# Altium PCB SD171-5.0PCB2.PcbDoc (part 1 of 5)
Units mm, origin at the board's own origin, x right, y up, seen from the top; angles counter-clockwise.
Board outline 152.27 x 99.6 mm, 6 copper layers (Top Layer, InternalPlane1, Mid-Layer 1, Mid-Layer 2, InternalPlane2, Bottom Layer); 325 components, 250 nets, 1794 pads, 490 vias.
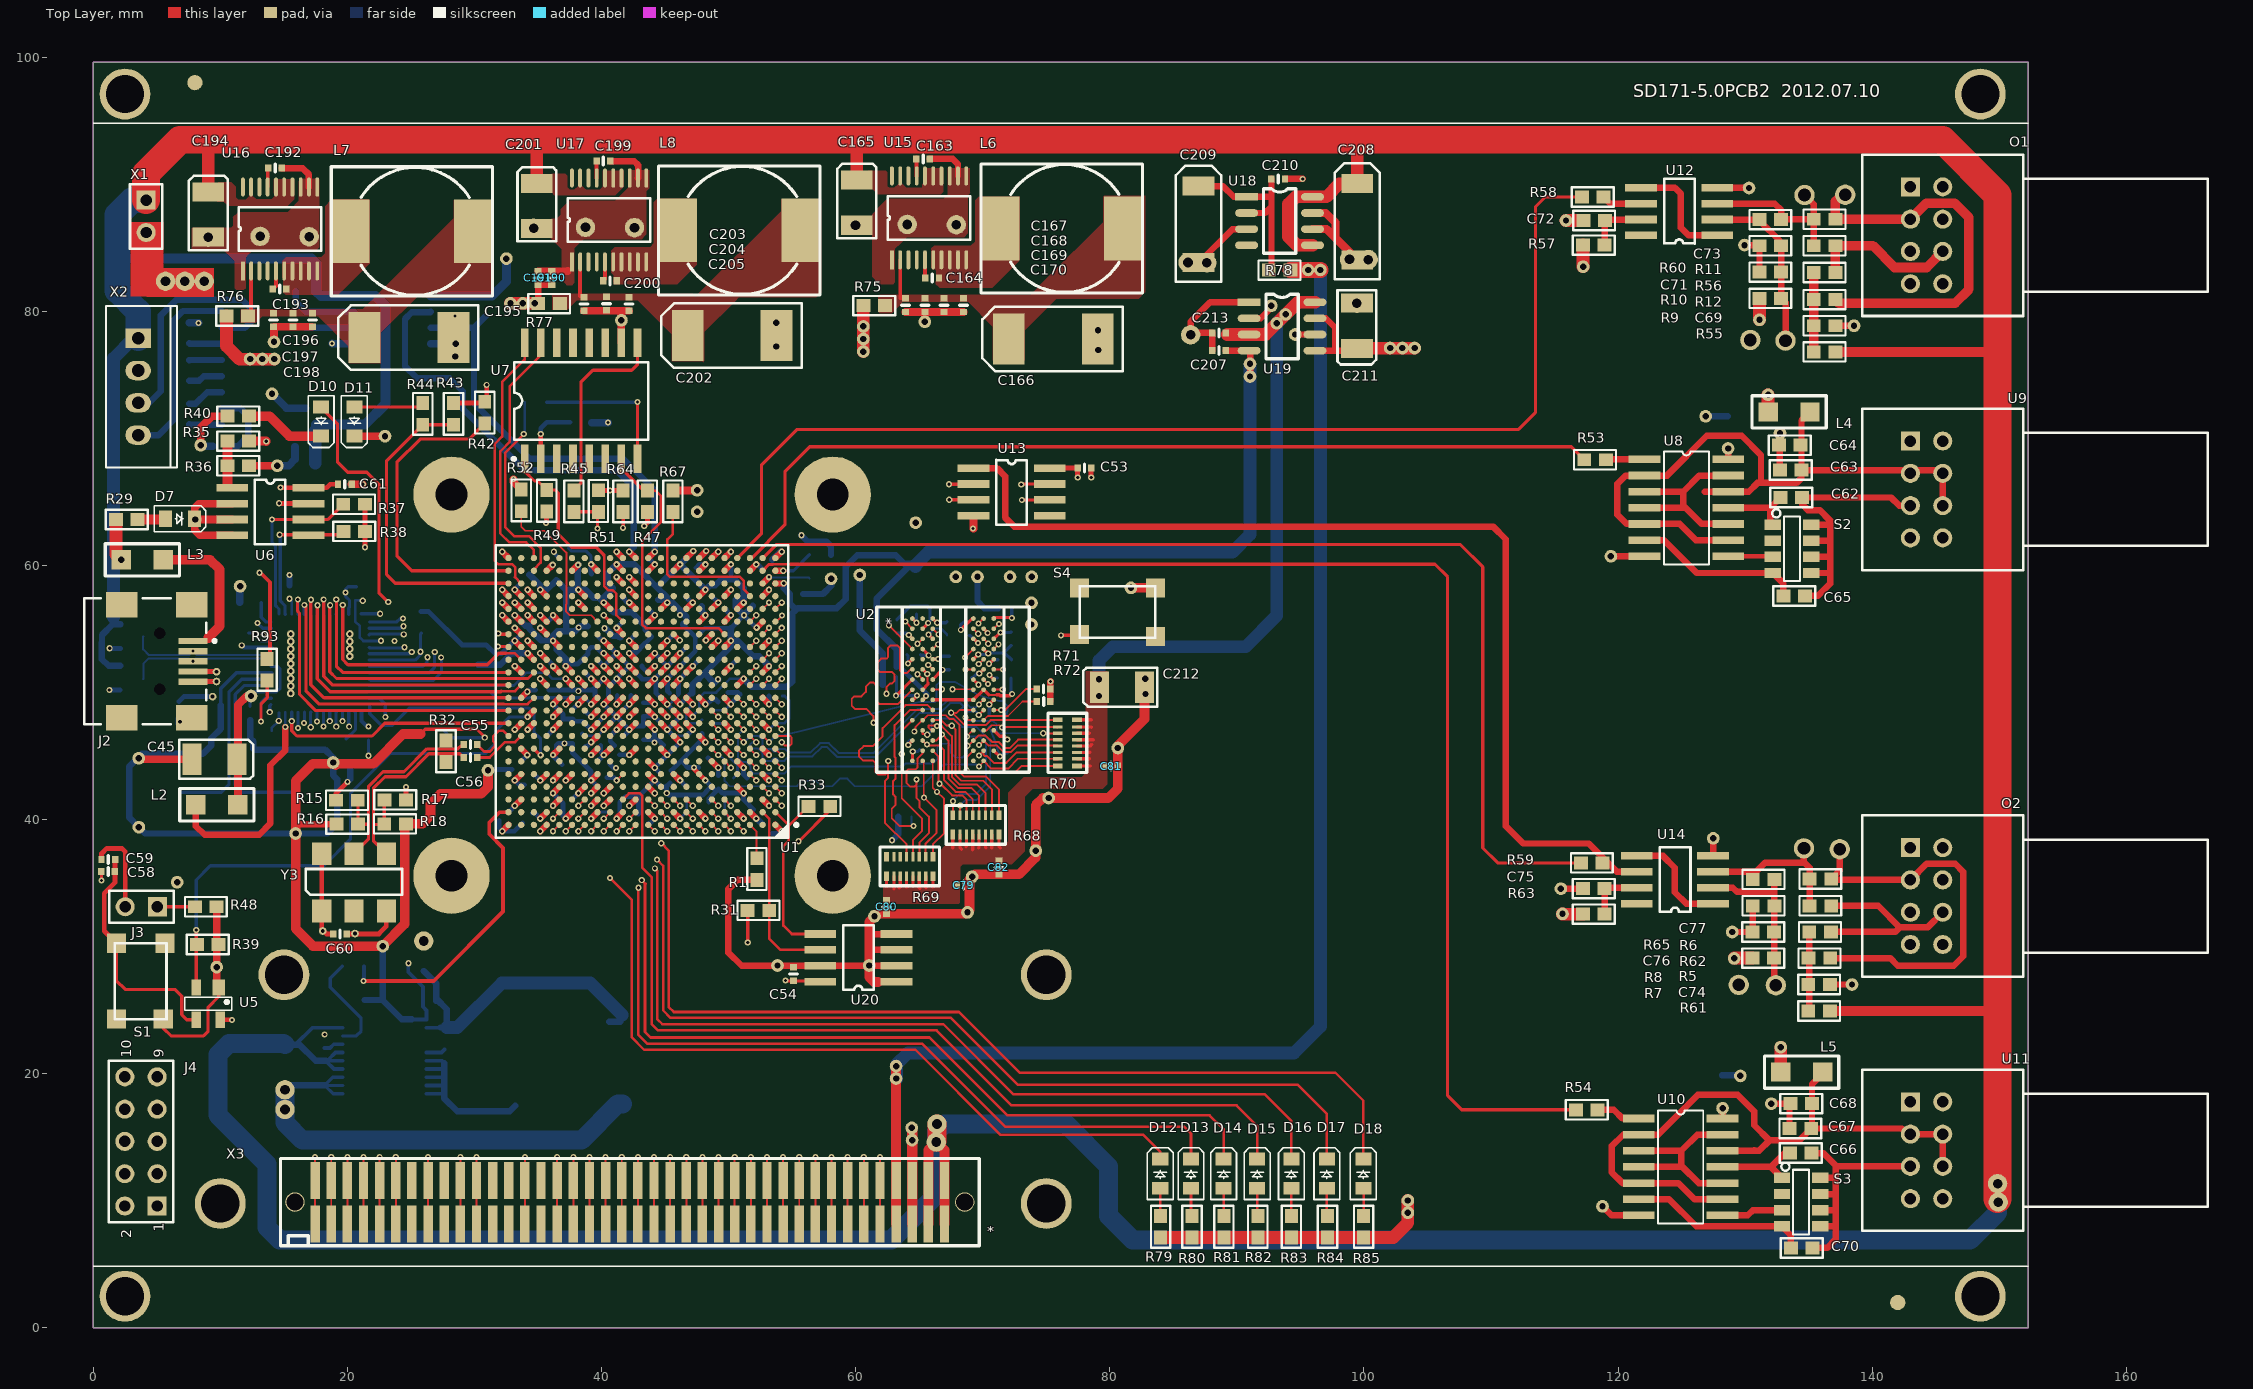
[diagram p0: Top Layer view]
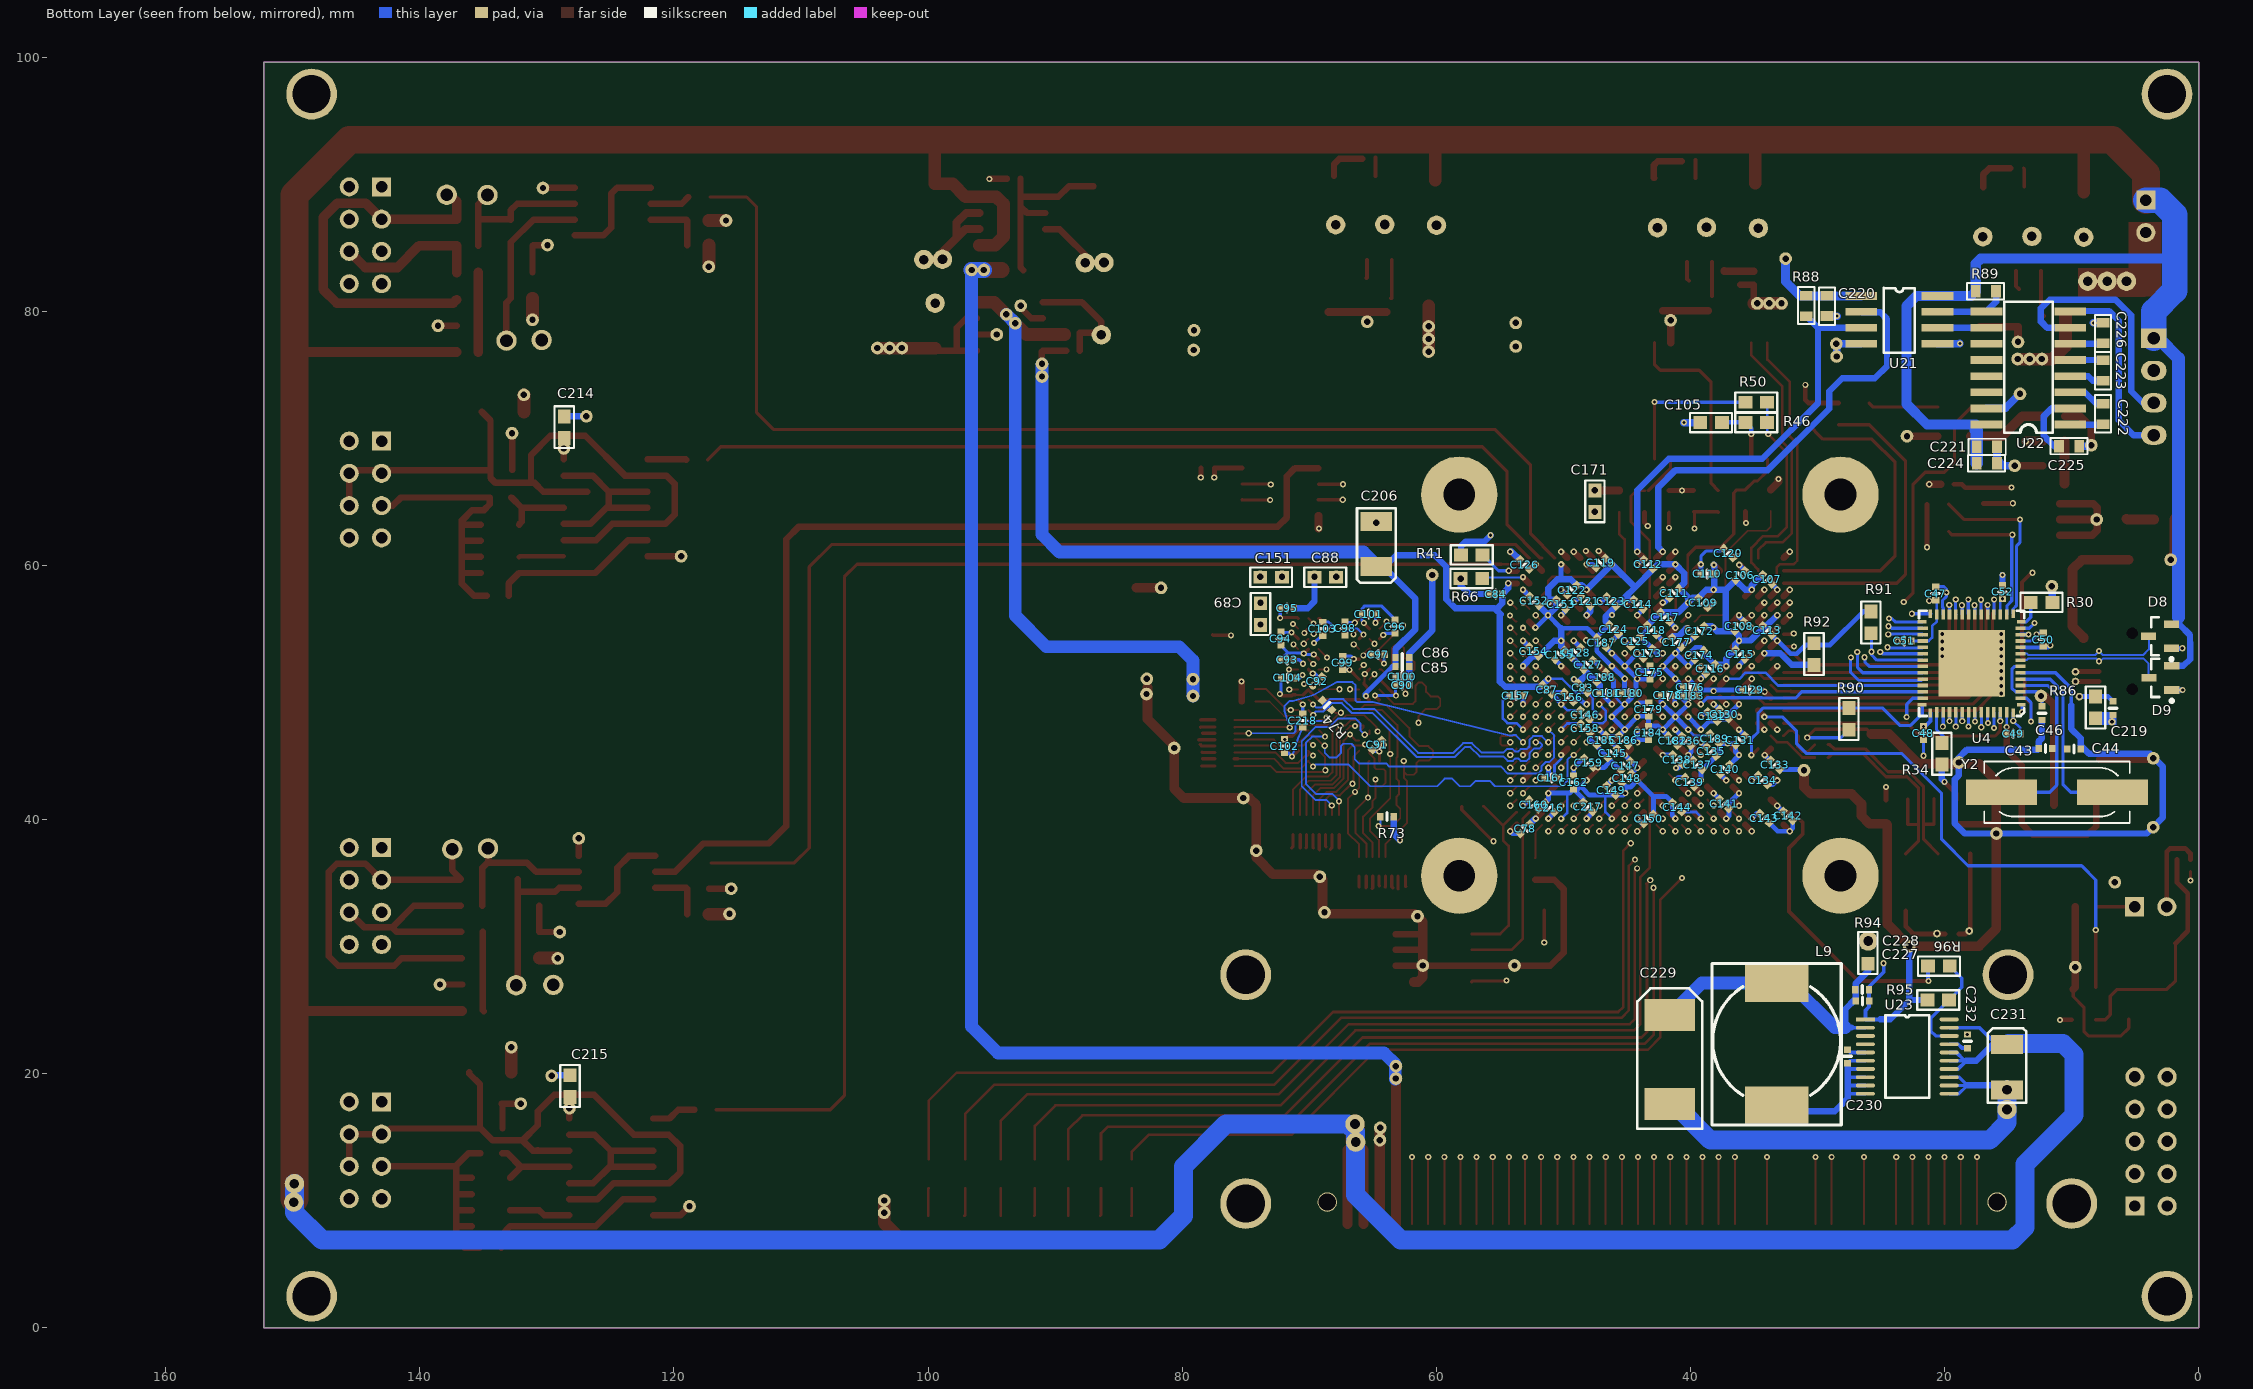
[diagram p1: Bottom Layer view, seen from below]
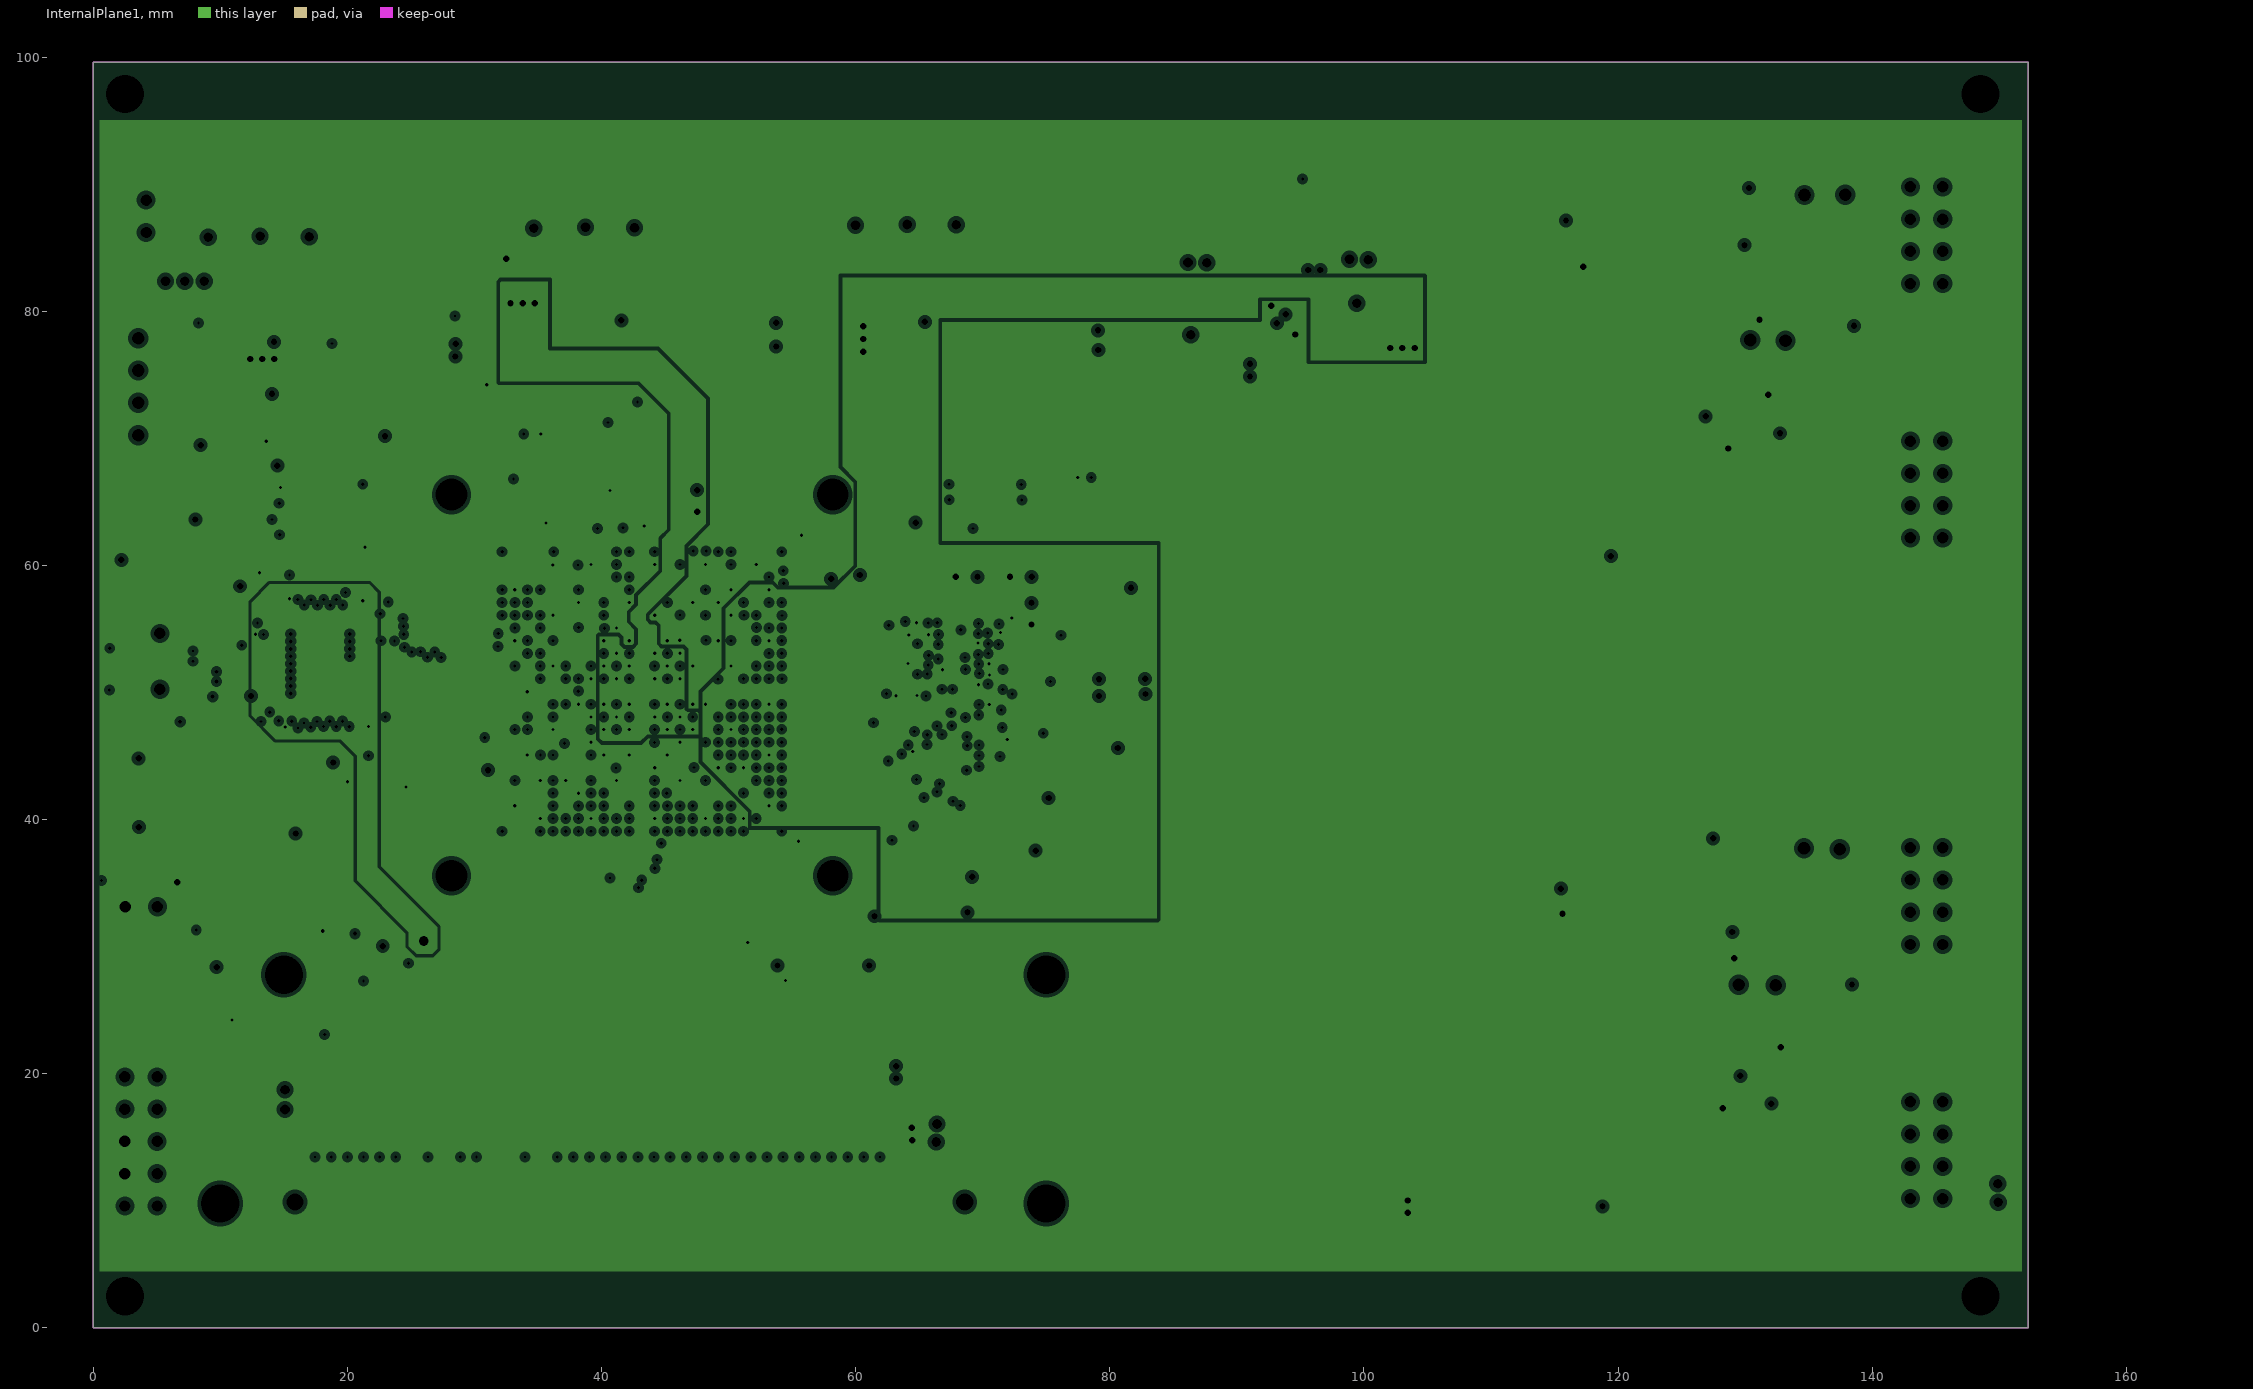
[diagram p2: InternalPlane1, clearances drawn from the general rule]
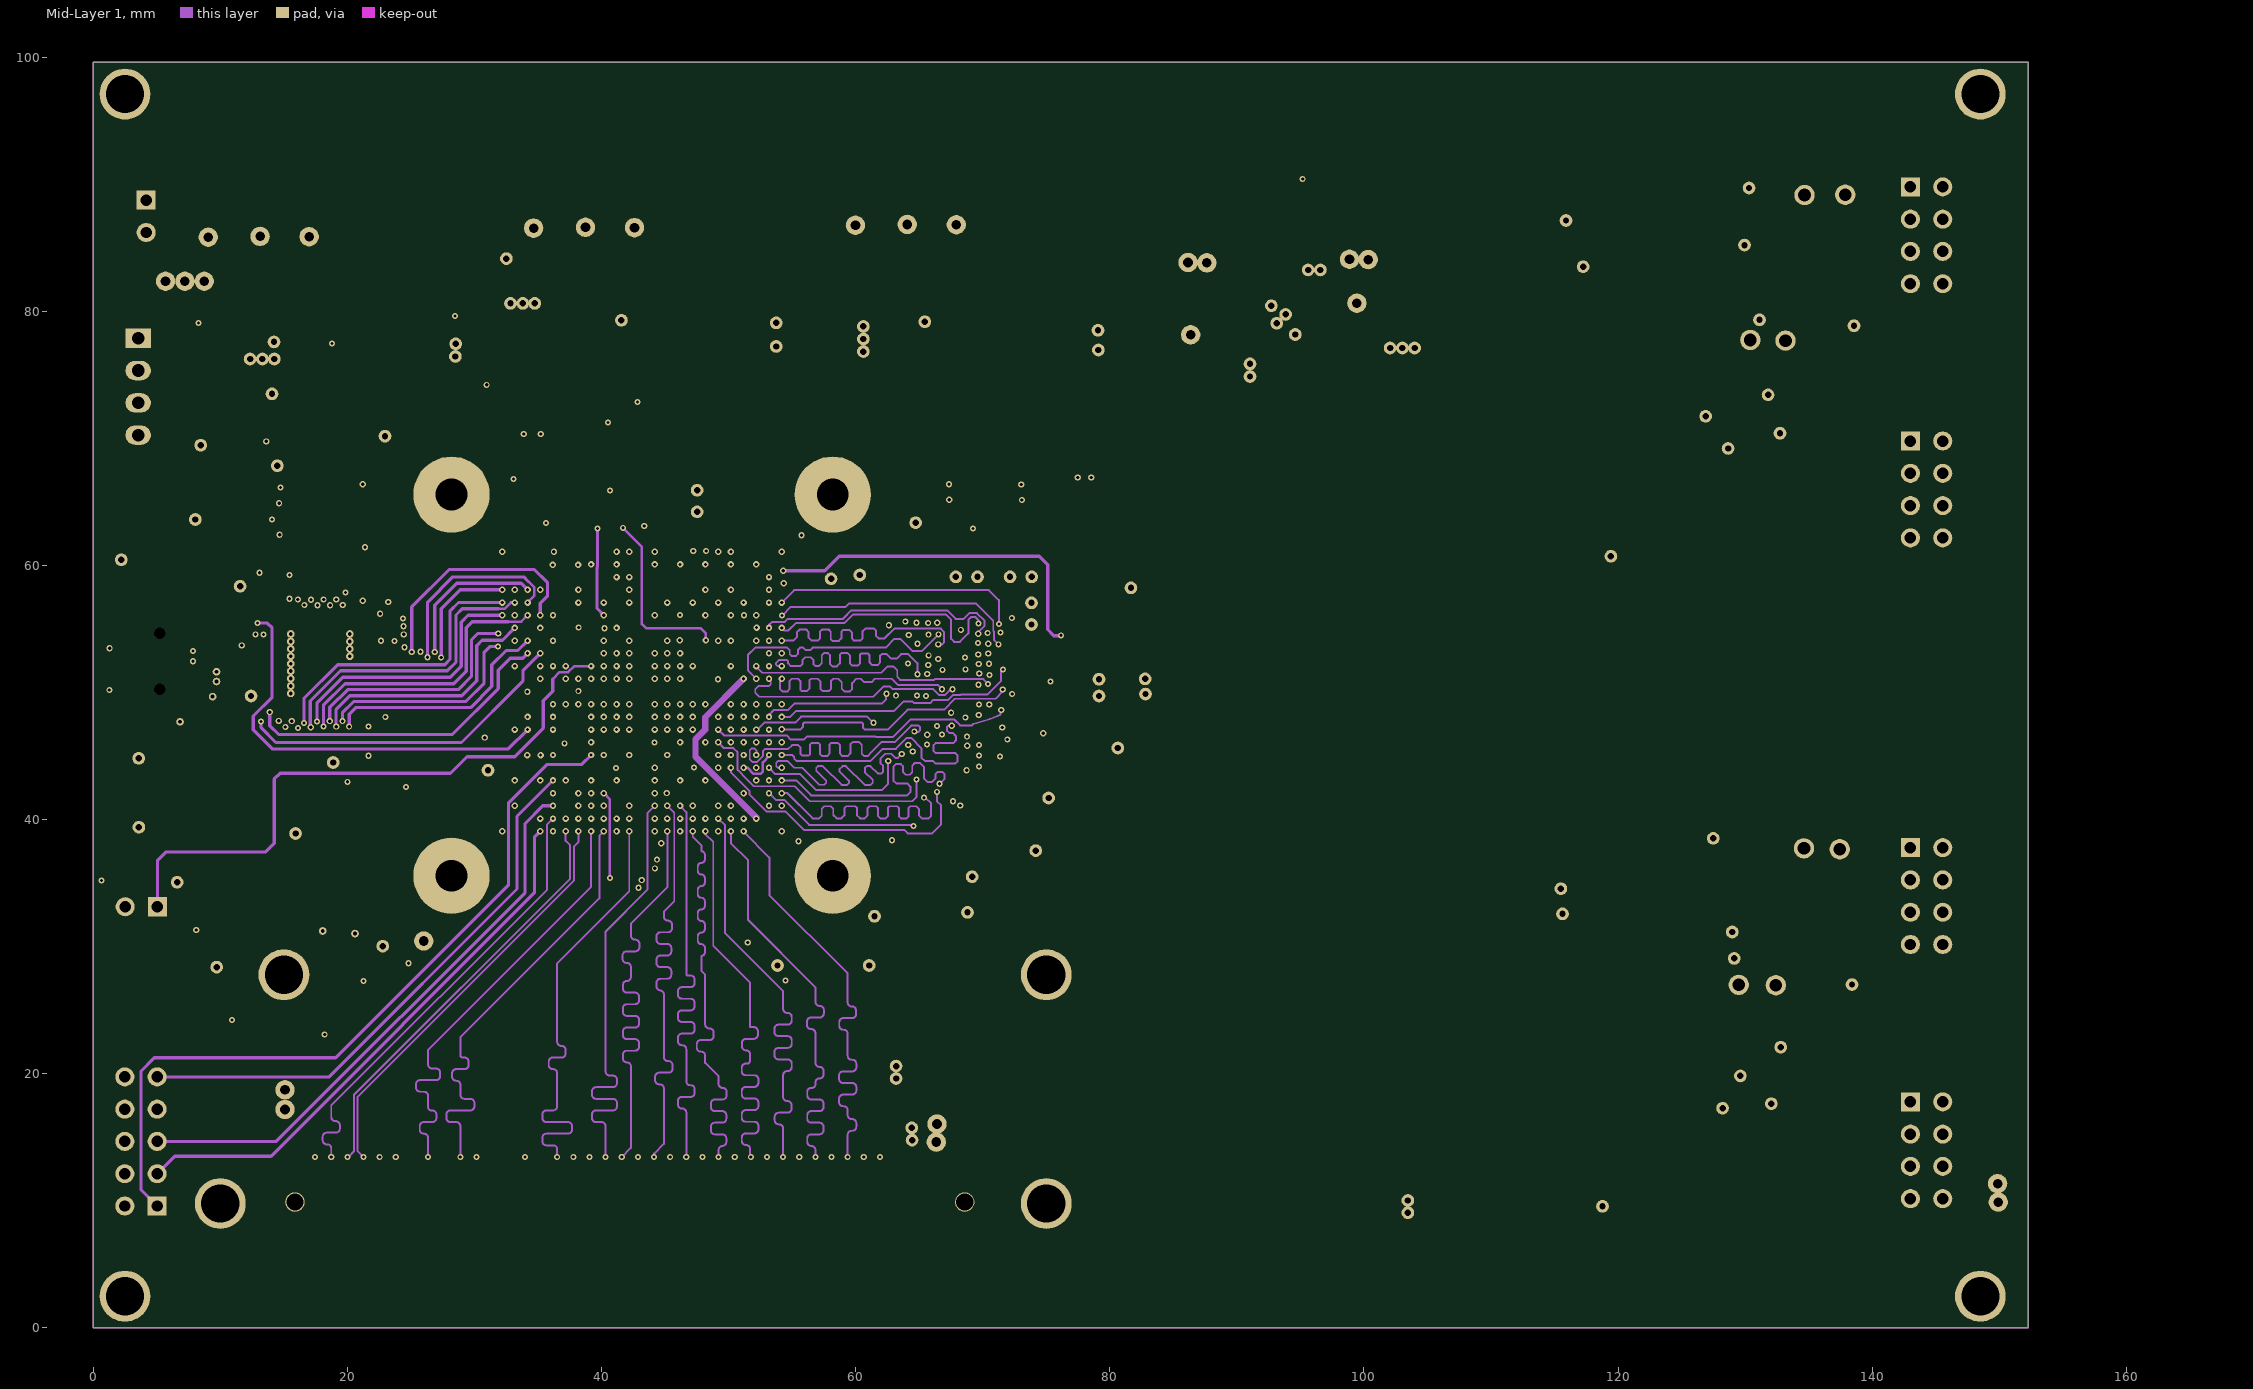
[diagram p3: Mid-Layer 1]
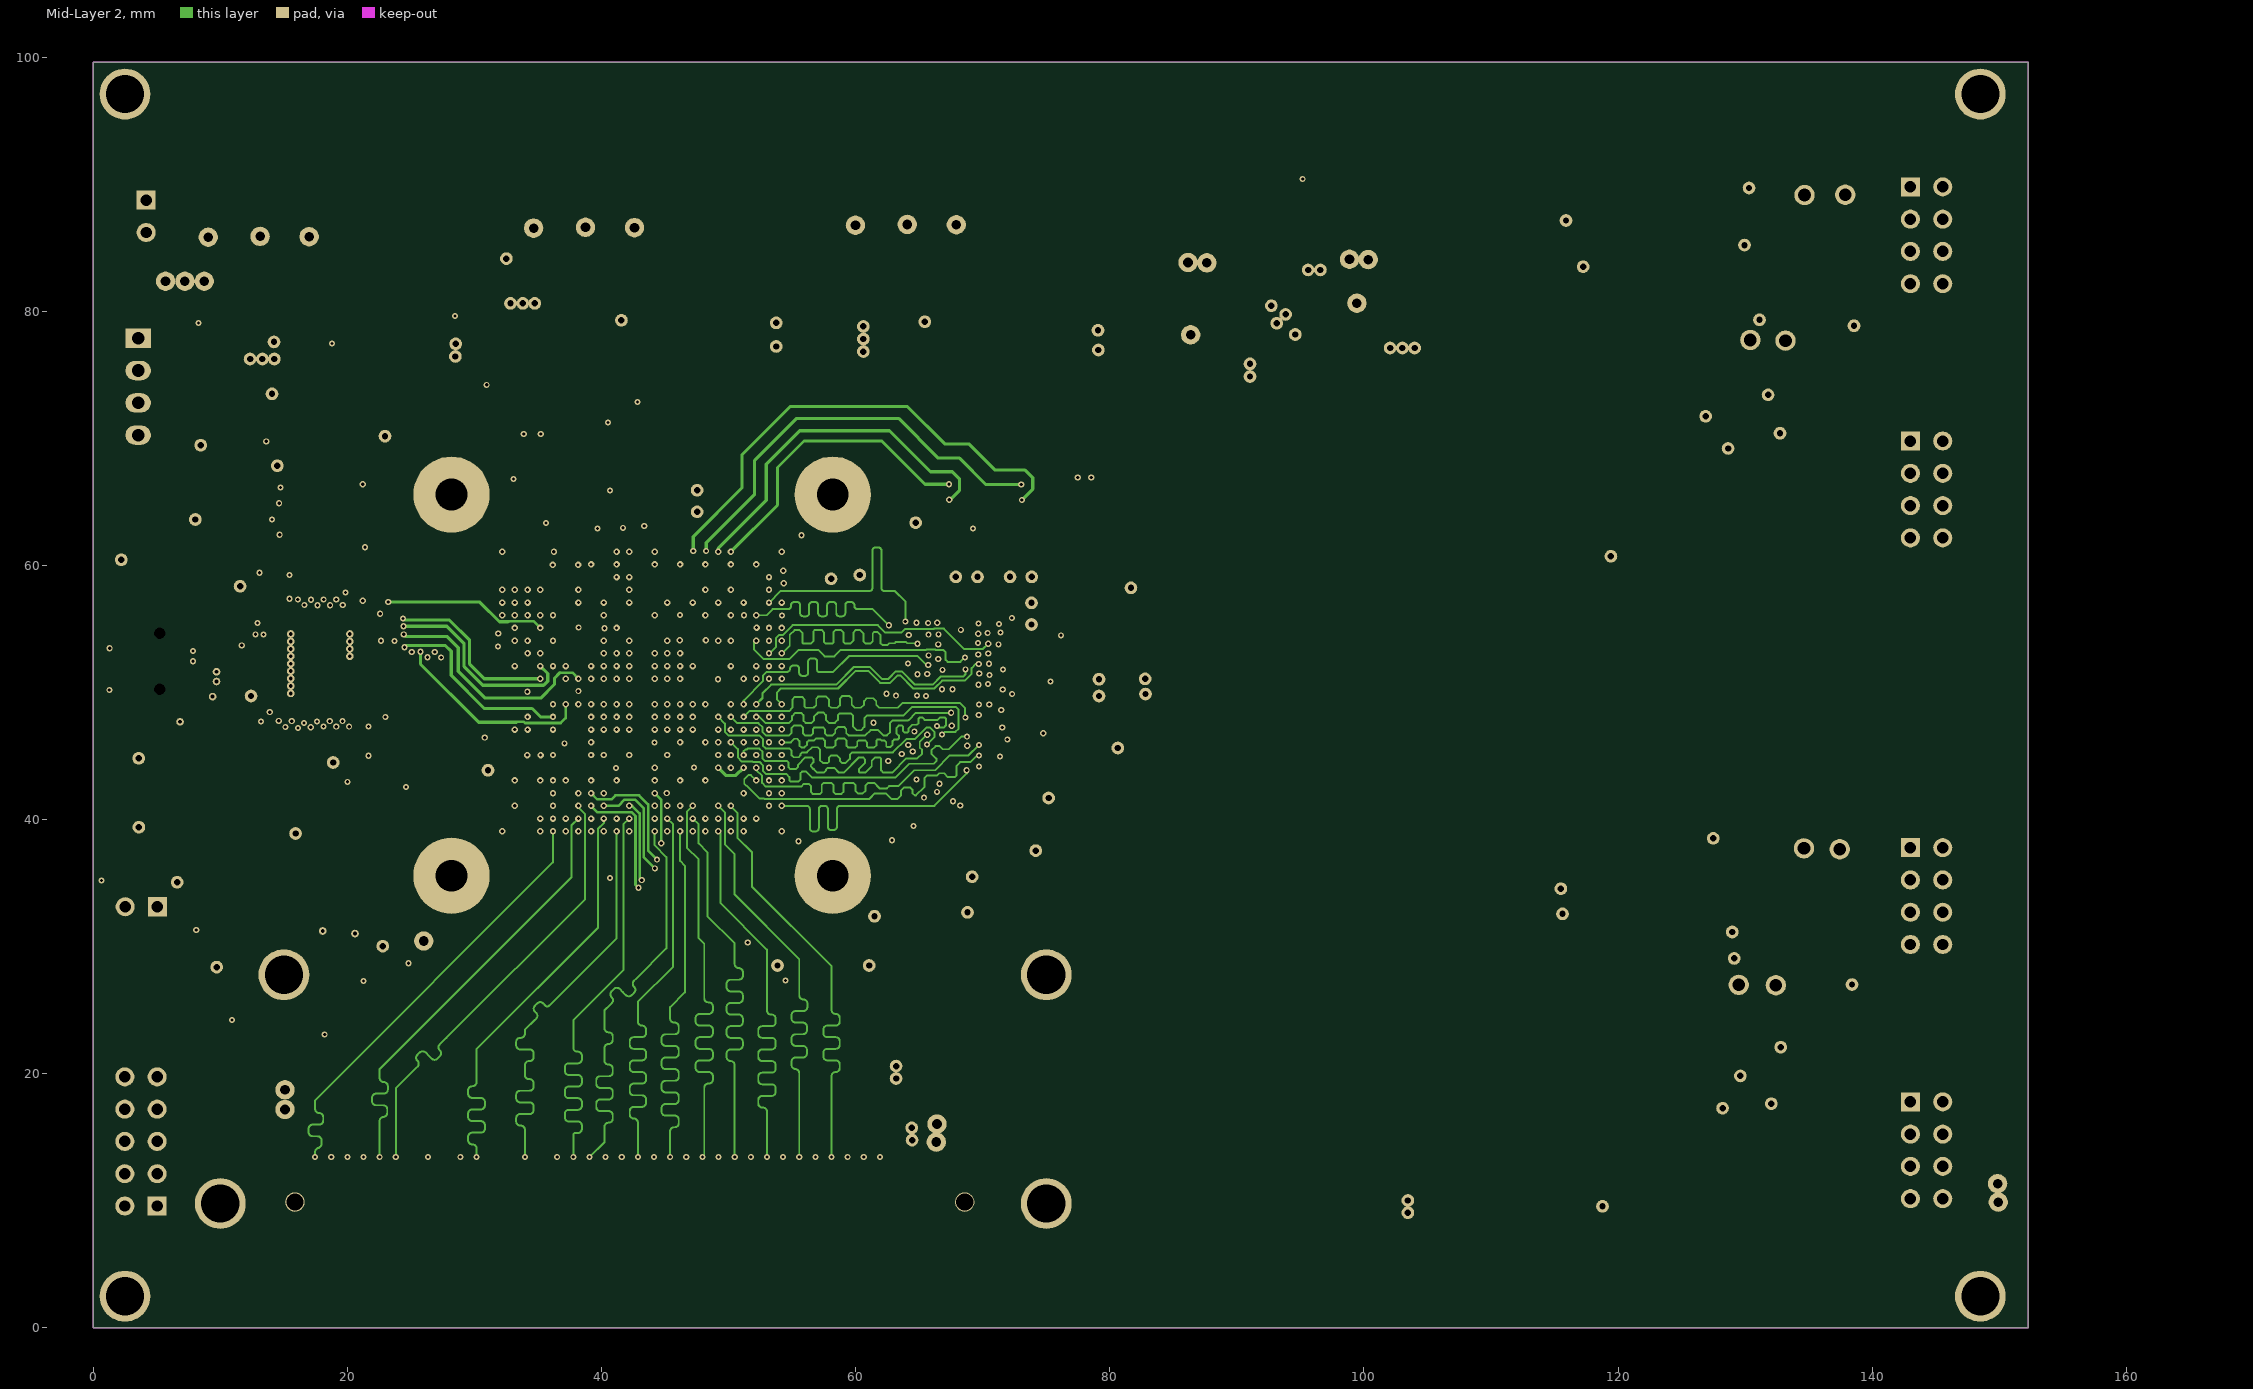
[diagram p4: Mid-Layer 2]
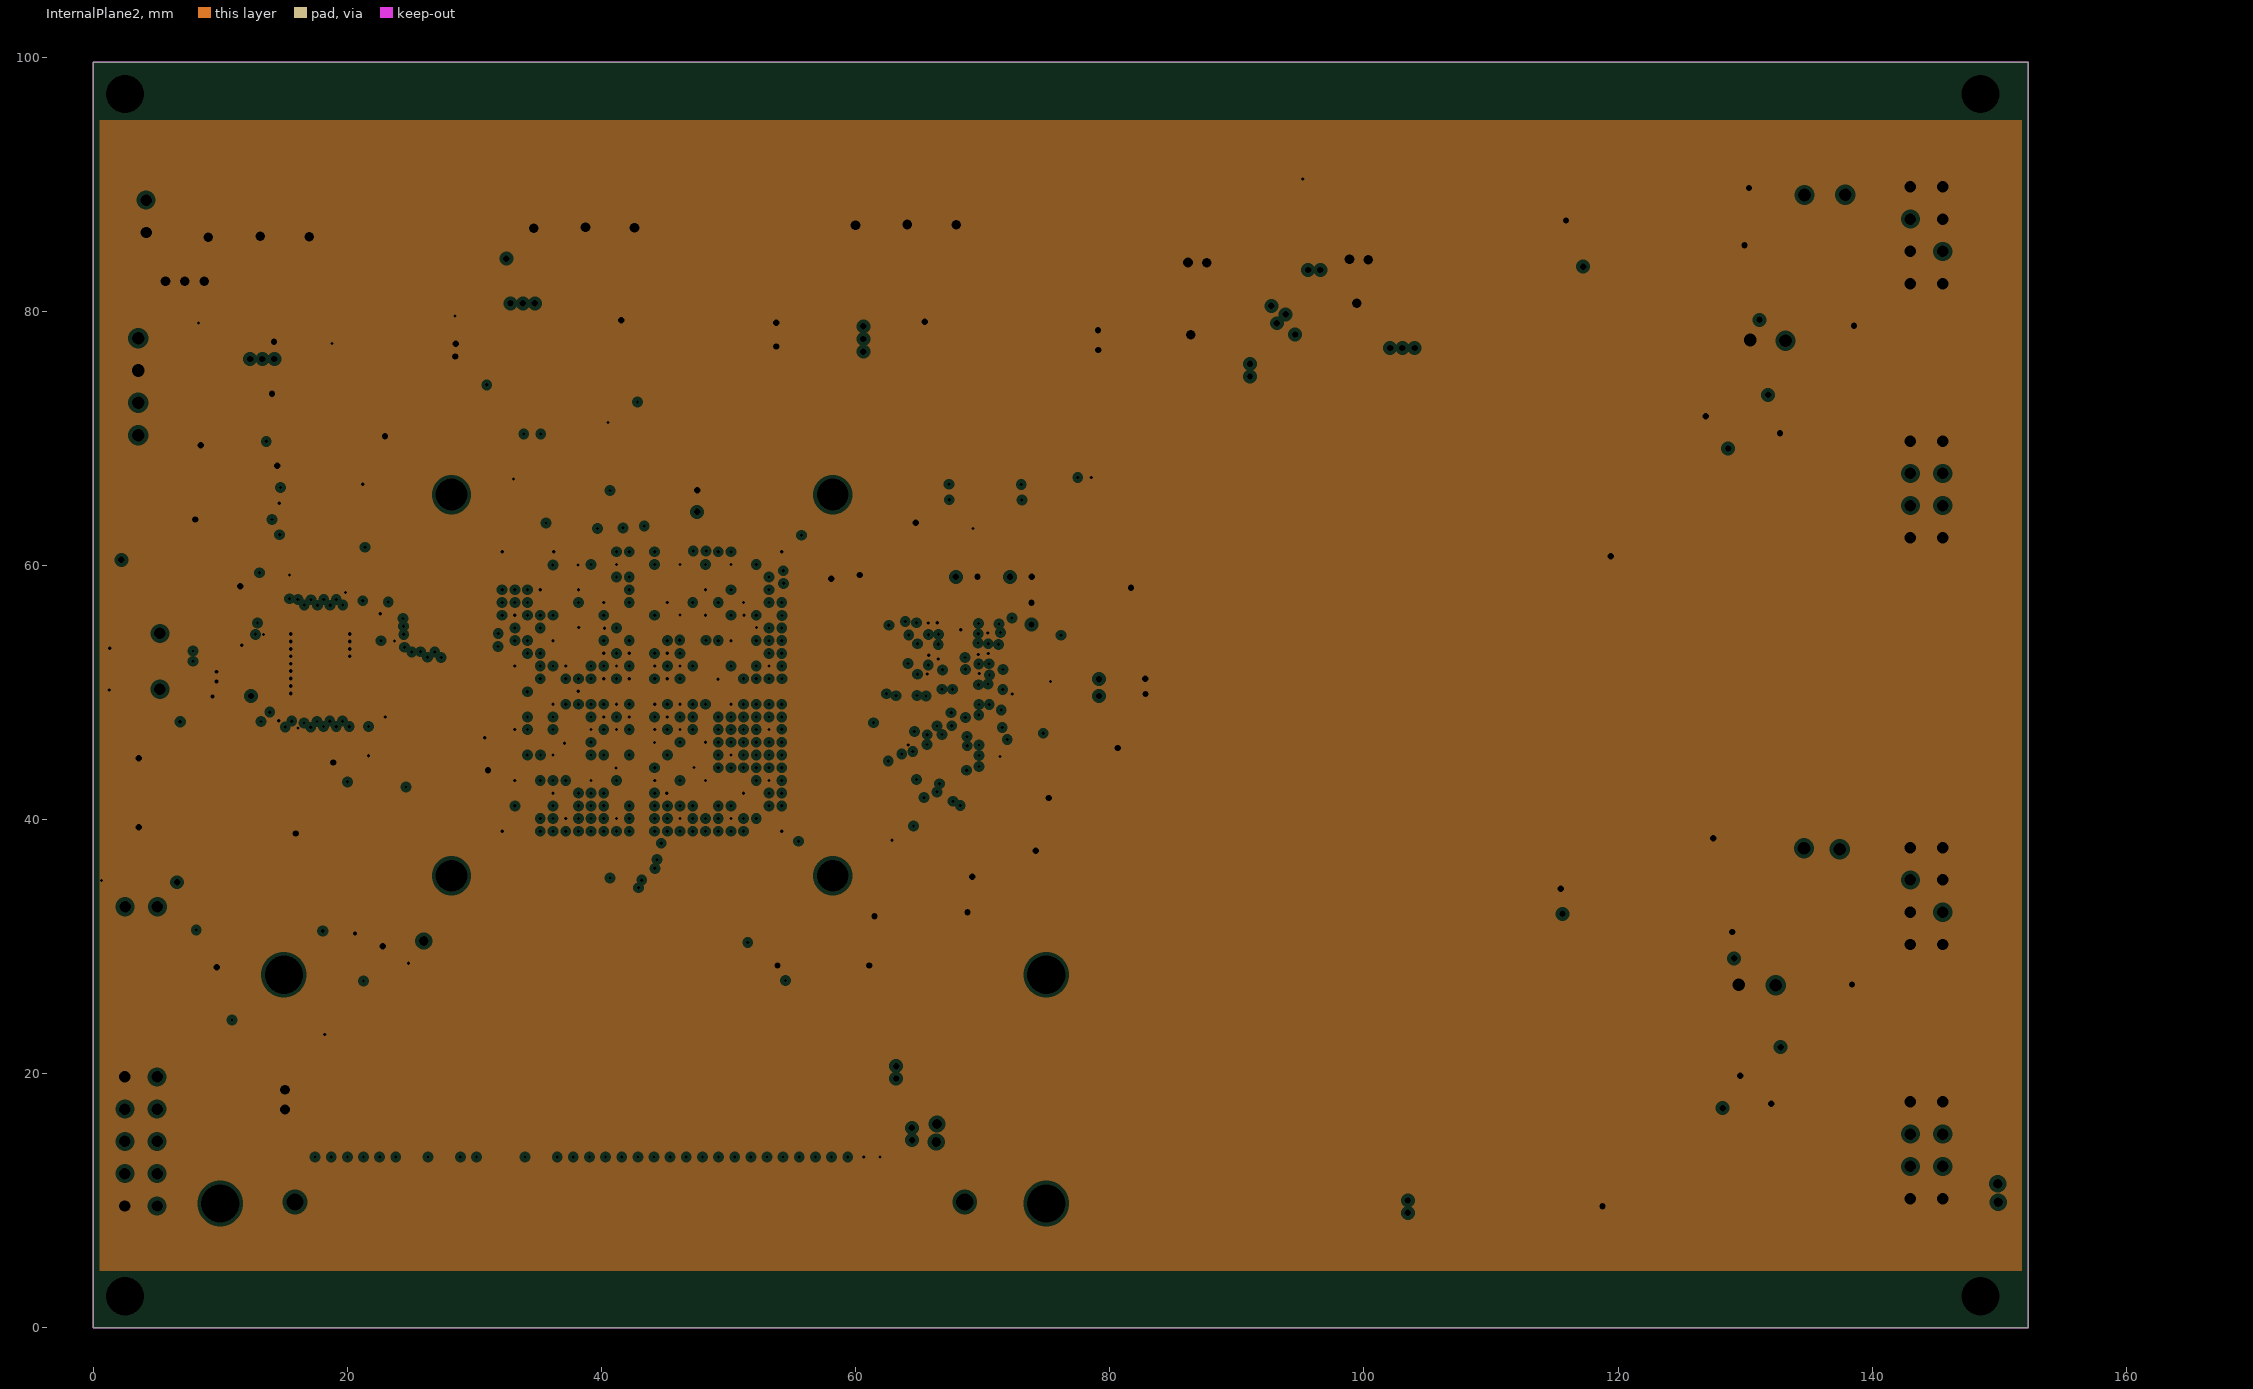
[diagram p5: InternalPlane2, clearances drawn from the general rule]

## Layer stack, top to bottom
Top Layer: signal copper 0.0356
Dielectric: prepreg 0.32, FR-4, Dk 4.8
InternalPlane1: plane copper 0.0356, net (Multiple Nets)
Dielectric: core 0.32, FR-4, Dk 4.8
Mid-Layer 1: signal copper 0.0356
Dielectric: prepreg 0.32, FR-4, Dk 4.8
Mid-Layer 2: signal copper 0.0356
Dielectric: core 0.32, FR-4, Dk 4.8
InternalPlane2: plane copper 0.0356, net GND
Dielectric: prepreg 0.32, FR-4, Dk 4.8
Bottom Layer: signal copper 0.0356

## Board outline
0,0 0,99.6 152.273,99.6 152.273,0 0,0

## Design rules (kind name [scope] priority, off if disabled: settings)
Clearance [All] p1: gap=0.127
DiffPairsRouting [All] p1: maxlimit=0.127 minlimit=0.127 mostfreqgap=0.127 maxuncoupledlength=12.7
FanoutControl Fanout_Default [All] p5: bgadir=NW bgaviamode=Centered fanoutstyle=Auto fanoutdirection=Alternating viagrid=0.025 // Fanout_Default (Default Rule)
Length "InNet('DDR2_DQ15') Or InNet('DDR2_DQ10')" [InNet('DDR2_DQ15') Or InNet('DDR2_DQ10')] p1: maxlimit=31.884 minlimit=0
Length "InNet('DDR2_DQ15') Or InNet('DDR2_LDQS_P')" [InNet('DDR2_DQ15') Or InNet('DDR2_LDQS_P')] p2: maxlimit=32.663 minlimit=0
MatchedLengths DiffPair_MatchedLengths [InDifferentialPair ('DDR2_UDQS')] p1: tolerance=25.4 checknetsindiffpair=TRUE checkdiffpairvsdiffpair=TRUE checkothers=TRUE
MatchedLengths DiffPair_MatchedLengths_1 [InDifferentialPair ('DDR2_CLK')] p2: tolerance=25.4 checknetsindiffpair=TRUE checkdiffpairvsdiffpair=TRUE checkothers=TRUE
MatchedLengths DiffPair_MatchedLengths_1_1 [InDifferentialPair ('TD3')] p3: tolerance=25.4 checknetsindiffpair=TRUE checkdiffpairvsdiffpair=TRUE checkothers=TRUE
MatchedLengths DiffPair_MatchedLengths_2 [InDifferentialPair ('TD2')] p4: tolerance=25.4 checknetsindiffpair=TRUE checkdiffpairvsdiffpair=TRUE checkothers=TRUE
MatchedLengths DiffPair_MatchedLengths_3 [InDifferentialPair ('TD1')] p5: tolerance=25.4 checknetsindiffpair=TRUE checkdiffpairvsdiffpair=TRUE checkothers=TRUE
MatchedLengths DiffPair_MatchedLengths_4 [InDifferentialPair ('TD0')] p6: tolerance=25.4 checknetsindiffpair=TRUE checkdiffpairvsdiffpair=TRUE checkothers=TRUE
MatchedLengths DiffPair_MatchedLengths_5 [InDifferentialPair ('D1')] p7: tolerance=25.4 checknetsindiffpair=TRUE checkdiffpairvsdiffpair=TRUE checkothers=TRUE
MatchedLengths DiffPair_MatchedLengths_6 [InDifferentialPair ('D1')] p8: tolerance=25.4 checknetsindiffpair=TRUE checkdiffpairvsdiffpair=TRUE checkothers=TRUE
MatchedLengths DiffPair_MatchedLengths_7 [InDifferentialPair ('DDR2_LDQS')] p9: tolerance=25.4 checknetsindiffpair=TRUE checkdiffpairvsdiffpair=TRUE checkothers=TRUE
MatchedLengths DiffPair_MatchedLengths_6_1 [InDifferentialPair ('DDR2_CLK')] p10: tolerance=25.4 checknetsindiffpair=TRUE checkdiffpairvsdiffpair=TRUE checkothers=TRUE
MatchedLengths DiffPair_MatchedLengths_5_1 [InDifferentialPair ('DDR2_CLK')] p11: tolerance=25.4 checknetsindiffpair=TRUE checkdiffpairvsdiffpair=TRUE checkothers=TRUE
MatchedLengths DiffPair_MatchedLengths_1_1_1 [InDifferentialPair ('DDR2_CLK')] p12: tolerance=25.4 checknetsindiffpair=TRUE checkdiffpairvsdiffpair=TRUE checkothers=TRUE
MatchedLengths DiffPair_MatchedLengths_2_1 [InDifferentialPair ('DDR2_LDQS')] p13: tolerance=25.4 checknetsindiffpair=TRUE checkdiffpairvsdiffpair=TRUE checkothers=TRUE
MatchedLengths DiffPair_MatchedLengths_3_1 [InDifferentialPair ('DDR2_CLK')] p14: tolerance=25.4 checknetsindiffpair=TRUE checkdiffpairvsdiffpair=TRUE checkothers=TRUE
MatchedLengths DiffPair_MatchedLengths_4_1 [InDifferentialPair ('TD0')] p15: tolerance=25.4 checknetsindiffpair=TRUE checkdiffpairvsdiffpair=TRUE checkothers=TRUE
MaxMinImpedance [All] p1: minimum=1.000 maximum=10.00
PlaneClearance [All] p1: clearance=0.3
PlaneConnect [All] p1: planeconnectstyle=Relief reliefexpansion=0.508 reliefentries=4 reliefconductorwidth=0.762 reliefairgap=0.254
PolygonConnect [All] p1: connectstyle=Direct reliefconductorwidth=0.254 reliefentries=4 polygonreliefangle="90 Angle"
RoutingVias [All] p1: holewidth=0.254 width=0.483 viastyle="Through Hole" minholewidth=0.254 minwidth=0.483 maxholewidth=0.254 maxwidth=0.762
SignalStimulus [All] p1: kind=1 level=0 starttime=5.000n stoptime=10.00n periodtime=10.00n
SilkscreenOverComponentPads [All] p1: minsilkscreentomaskgap=0.254
SolderMaskExpansion [All] p1: expansion=0.102
SupplyNets SupplyNets_5 [InNet('GND')] p1: voltage=0.000
SupplyNets SupplyNets_4 [InNet('VCC1V2')] p2: voltage=1.200
SupplyNets SupplyNets_3 [InNet('VCC1V8')] p3: voltage=1.800
SupplyNets SupplyNets_2 [InNet('VCC3V3')] p4: voltage=3.300
SupplyNets SupplyNets_1 [InNet('VCC5V')] p5: voltage=5.000
SupplyNets [InNet('VCC2V5')] p6: voltage=2.500
Width [All] p1: maxlimit=12.7 minlimit=0.127 preferedwidth=0.254
23 further rules are at their usual default settings.

## Classes and differential pairs
component class Sheet1: D12 D13 D14 D15 D16 D17 D18 R1 R79 R80 R81 R82 R83 R84 R85 U1 X3
component class Sheet2: C43 C44 C45 C46 C47 C48 C49 C50 C51 C52 C53 C55 C56 C58 C59 C60 C219 C227 C228 C229 C230 C231 C232 D7 D8 D9 D10 J2 L2 L3 L9 R15 R16 R17 R18 R29 R30 R32 R34 R35 R36 R37 R38 R39 R40 R86 R90 R91 R92 R93 R94 R95 R96 S1 U4 U5 U6 U23 Y2 Y3
component class Sheet3: C61 C62 C63 C64 C65 C66 C67 C68 C69 C70 C71 C72 C73 C74 C75 C76 C77 C214 C215 C220 C221 C222 C223 C224 C225 C226 D11 J3 J4 L4 L5 O1 O2 R5 R6 R7 R8 R9 R10 R11 R12 R41 R42 R43 R44 R45 R46 R47 R48 R49 R50 R51 R52 R53 R54 R55 R56 R57 R58 R59 R60 R61 R62 R63 R64 R65 R88 R89 S2 S3 S4 U7 U8 U9 U10 U11 U12 U13 U14 U21 U22 X2
component class Sheet4: C54 C78 C79 C80 C81 C82 C83 C84 C85 C86 C87 C88 C89 C90 C91 C92 C93 C94 C95 C96 C97 C98 C99 C100 C101 C102 C103 C104 C218 R31 R33 R66 R67 R68 R69 R70 R71 R72 R73 R74 U2 U20
component class Sheet5: C105 C106 C107 C108 C109 C110 C111 C112 C113 C114 C115 C116 C117 C118 C119 C120 C121 C122 C123 C124 C125 C126 C127 C128 C129 C130 C131 C132 C133 C134 C135 C136 C137 C138 C139 C140 C141 C142 C143 C144 C145 C146 C147 C148 C149 C150 C151 C152 C153 C154 C155 C156 C157 C158 C159 C160 C161 C162 C163 C164 C165 C166 C167 C168 C169 C170 C171 C172 C173 C174 C175 C176 C177 C178 C179 C180 C181 C182 C183 C184 C185 C186 C187 C188 C189 C190 C191 C192 C193 C194 C195 C196 C197 C198 C199 C200 C201 C202 C203 C204 C205 C206 C207 C208 C209 C210 C211 C212 C213 C216 C217 L6 L7 L8 R75 R76 R77 R78 U15 U16 U17 U18 U19 X1
net class DATA_L: DDR2_DQ0 DDR2_DQ1 DDR2_DQ2 DDR2_DQ3 DDR2_DQ4 DDR2_DQ5 DDR2_DQ6 DDR2_DQ7 DDR2_LDM DDR2_LDQS_N DDR2_LDQS_P
net class DATA_H: DDR2_DQ8 DDR2_DQ9 DDR2_DQ10 DDR2_DQ11 DDR2_DQ12 DDR2_DQ13 DDR2_DQ14 DDR2_DQ15 DDR2_UDM DDR2_UDQS_N DDR2_UDQS_P
net class ADDRESS: DDR2_A0 DDR2_A1 DDR2_A2 DDR2_A3 DDR2_A4 DDR2_A5 DDR2_A6 DDR2_A7 DDR2_A8 DDR2_A9 DDR2_A10 DDR2_A11 DDR2_A12 DDR2_A13 DDR2_A14
net class CLOCK: DDR2_CLK_N DDR2_CLK_P
net class COMMAND: DDR2_BA0 DDR2_BA1 DDR2_BA2 DDR2_CAS_B DDR2_RAS_B DDR2_WE_B
net class CONTROL: DDR2_CKE DDR2_ODT
net class EXTEND: E-COL E-CRS E-GTXCLK E-INT E-MDC E-RXCLK E-RXD0 E-RXD1 E-RXD2 E-RXD3 E-RXD4 E-RXD5 E-RXD6 E-RXD7 E-RXDV E-RXER E-TXCLK E-TXD0 E-TXD1 E-TXD2 E-TXD3 E-TXD4 E-TXD5 E-TXD6 E-TXD_N E-TXD_P E-TXEN E-TXER E_RESET NetX3_51 NetX3_52 NetX3_55 NetX3_56 NetX3_57 NetX3_58 NetX3_63 NetX3_64 NetX3_67 NetX3_68
differential pair DDR2_UDQS: +DDR2_UDQS_P -DDR2_UDQS_N
differential pair DDR2_LDQS: +DDR2_LDQS_P -DDR2_LDQS_N
differential pair DDR2_CLK: +DDR2_CLK_P -DDR2_CLK_N
differential pair D1: +D1_P -D1_N
differential pair E-TXD: +E-TXD_P -E-TXD_N

## Components (designator, comment, footprint, x,y, rotation, side; value= is the part's Value field where it differs from the comment)
C43 "220" 0402#1 12.598,45.593 r180 bottom
C44 "220" 0402#1 9.296,45.568 r0 bottom
C45 "10UF/20V" CAP-B 9.677,44.755 r0 top
C46 "104" 0402#1 12.344,47.854 r90 bottom
C47 "104" 0402#1 20.701,58.318 r270 bottom
C48 "104" 0402#1 21.666,46.279 r90 bottom
C49 "104" 0402#1 14.072,46.761 r0 bottom
C50 "104" 0402#1 12.243,53.645 r90 bottom
C51 "104" 0402#1 23.698,54.077 r180 bottom
C52 "104" 0402#1 15.443,58.445 r270 bottom
C53 "104" 0402#1 77.47,67.666 r0 top
C54 "104" 0402#1 55.093,28.372 r270 top
C55 "104" 0402#1 29.159,45.909 r0 top
C56 "104" 0402#1 29.159,44.893 r0 top
C58 "104" 0402#1 1.702,35.916 r180 top
C59 "104" 0402#1 0.66,36.881 r0 top
C60 "104" 0402#1 19.939,31.013 r180 top
C61 "104" 0402#1 20.32,66.396 r180 top
C62 "101" 0603 133.629,65.354 r180 top
C63 "104" 0603 133.579,67.513 r180 top
C64 "103" 0603 133.502,69.469 r0 top
C65 "101" 0603 133.858,57.607 r180 top
C66 "101" 0603 134.366,13.767 r180 top
C67 "104" 0603 134.341,15.697 r180 top
C68 "103" 0603 134.417,17.653 r0 top
C69 "104" 0603 136.246,78.867 r0 top
C70 "101" 0603 134.442,6.299 r180 top
C71 "332" 0603 131.978,85.166 r180 top
C72 "104" 0603 118.11,87.147 r180 top
C73 "332" 0603 136.246,87.249 r0 top
C74 "104" 0603 135.814,27.026 r0 top
C75 "104" 0603 118.085,34.569 r180 top
C76 "332" 0603 131.445,33.223 r180 top
C77 "332" 0603 135.915,35.331 r0 top
C78 "104" 0402#1 53.391,38.913 r135 bottom
C79 "104" 0402#1 69.012,34.849 r180 top
C80 "104" 0402#1 62.433,32.614 r90 top
C81 "104" 0402#1 80.62,44.221 r180 top
C82 "104" 0402#1 71.272,35.712 r90 top
C83 "104" 0402#1 48.844,50.749 r225 bottom
C84 "104" 0402#1 55.855,57.76 r180 bottom
C85 "104" 0402#1 62.154,52.045 r0 bottom
C86 "102" 0402#1 62.154,52.756 r0 bottom
C87 "104" 0402#1 50.902,49.86 r45 bottom
C88 "226" 0603 68.732,59.08 r180 bottom
C89 "226" 0603 73.838,56.185 r270 bottom
C90 "104" 0402#1 62.154,50.597 r0 bottom
C91 "104" 0402#1 64.287,46.253 r315 bottom
C92 "104" 0402#2 68.986,51.257 r315 bottom
C93 "104" 0402#1 72.263,52.578 r180 bottom
C94 "104" 0402#1 72.238,53.721 r90 bottom
C95 "104" 0402#1 71.222,56.642 r0 bottom
C96 "104" 0402#1 63.246,55.728 r270 bottom
C97 "104" 0402#1 65.1,52.984 r180 bottom
C98 "104" 0402#1 67.183,55.575 r270 bottom
C99 "104" 0402#1 67.361,52.857 r270 bottom
C100 "104" 0402#1 62.154,51.257 r0 bottom
C101 "104" 0402#1 65.837,56.185 r180 bottom
C102 "104" 0402#1 71.933,45.263 r90 bottom
C103 "104" 0402#1 68.936,55.55 r270 bottom
C104 "104" 0402#1 72.212,51.156 r180 bottom
C105 "226" 0603 38.379,71.247 r180 bottom
C106 "104" 0402#1 36.449,58.852 r135 bottom
C107 "104" 0402#1 34.315,59.284 r225 bottom
C108 "104" 0402#1 36.525,54.839 r135 bottom
C109 "104" 0402#1 39.383,57.443 r225 bottom
C110 "104" 0402#1 38.151,59.334 r0 bottom
C111 "104" 0402#1 40.907,58.205 r315 bottom
C112 "104" 0402#1 42.939,59.729 r45 bottom
C113 "104" 0402#1 34.315,55.27 r225 bottom
C114 "104" 0402#1 44.463,57.316 r225 bottom
C115 "104" 0402#1 36.462,53.379 r225 bottom
C116 "104" 0402#1 38.057,52.241 r315 bottom
C117 "104" 0402#1 42.367,56.312 r225 bottom
C118 "104" 0402#1 43.409,55.296 r225 bottom
C119 "104" 0402#1 46.693,60.577 r315 bottom
C120 "104" 0402#1 36.652,60.604 r45 bottom
C121 "104" 0402#1 47.892,56.808 r45 bottom
C122 "104" 0402#1 48.946,58.445 r315 bottom
C123 "104" 0402#1 45.86,56.808 r45 bottom
C124 "104" 0402#1 46.406,55.347 r225 bottom
C125 "104" 0402#1 43.955,54.395 r315 bottom
C126 "104" 0402#1 53.416,60.452 r225 bottom
C127 "104" 0402#1 48.412,51.816 r135 bottom
C128 "104" 0402#1 49.378,52.781 r135 bottom
C129 "104" 0402#1 35.865,50.216 r180 bottom
C130 "104" 0402#1 36.982,47.93 r45 bottom
C131 "104" 0402#1 36.449,45.872 r135 bottom
C132 "104" 0402#1 37.897,47.752 r45 bottom
C133 "104" 0402#1 32.969,43.942 r45 bottom
C134 "104" 0402#1 33.934,42.748 r45 bottom
C135 "104" 0402#1 37.986,44.997 r45 bottom
C136 "104" 0402#1 40.693,46.577 r225 bottom
C137 "104" 0402#1 39.065,43.942 r45 bottom
C138 "104" 0402#1 40.653,44.362 r45 bottom
C139 "104" 0402#1 39.693,42.577 r45 bottom
C140 "104" 0402#1 36.906,44.323 r315 bottom
C141 "104" 0402#1 36.982,40.869 r45 bottom
C142 "104" 0402#1 31.953,39.929 r45 bottom
C143 "104" 0402#1 33.807,39.751 r45 bottom
C144 "104" 0402#1 41.427,41.351 r225 bottom
C145 "104" 0402#1 46.507,44.856 r135 bottom
C146 "104" 0402#1 48.666,48.616 r225 bottom
C147 "104" 0402#1 45.466,43.866 r135 bottom
C148 "104" 0402#1 45.39,42.901 r135 bottom
C149 "104" 0402#1 45.872,41.935 r45 bottom
C150 "104" 0402#1 42.926,40.437 r315 bottom
C151 "226" 0603 73,59.08 r180 bottom
C152 "104" 0402#1 51.918,56.845 r45 bottom
C153 "104" 0402#1 50.559,57.316 r225 bottom
C154 "104" 0402#1 51.956,52.871 r45 bottom
C155 "104" 0402#1 49.911,53.34 r315 bottom
C156 "104" 0402#1 49.936,50.013 r225 bottom
C157 "104" 0402#1 54.229,49.759 r180 bottom
C158 "104" 0402#1 47.904,46.812 r45 bottom
C159 "104" 0402#1 47.638,44.108 r45 bottom
C160 "104" 0402#1 51.956,40.806 r45 bottom
C161 "104" 0402#1 50.394,43.282 r0 bottom
C162 "104" 0402#1 49.2,42.418 r90 bottom
C163 "104" 0402#1 65.837,91.999 r180 top
C164 "473" 0402#1 66.548,82.626 r180 top
C165 "10UF/20V" CAP-B 60.082,88.682 r90 top
C166 "470UF/10V" CAP-D 75.55,77.836 r180 top
C167 "104" 0402#1 63.916,79.959 r90 top
C168 "104" 0402#1 65.44,79.959 r90 top
C169 "104" 0402#1 66.964,79.959 r90 top
C170 "102" 0402#1 68.488,79.959 r90 top
C171 "226" 0603 47.523,65.049 r270 bottom
C172 "104" 0402#1 38.913,55.22 r315 bottom
C173 "104" 0402#1 42.977,53.467 r315 bottom
C174 "104" 0402#1 38.938,53.315 r315 bottom
C175 "104" 0402#1 43.193,52.109 r270 bottom
C176 "104" 0402#1 39.497,50.419 r0 bottom
C177 "104" 0402#1 41.453,54.331 r225 bottom
C178 "104" 0402#1 41.25,49.784 r0 bottom
C179 "104" 0402#1 43.282,49.2 r270 bottom
C180 "104" 0402#1 45.352,49.95 r180 bottom
C181 "104" 0402#1 47.117,49.936 r180 bottom
C182 "104" 0402#1 41.021,45.847 r45 bottom
C183 "104" 0402#1 39.497,49.759 r0 bottom
C184 "104" 0402#1 43.307,46.304 r90 bottom
C185 "104" 0402#1 47.384,45.886 r135 bottom
C186 "104" 0402#1 44.882,45.872 r45 bottom
C187 "104" 0402#1 47.371,54.305 r225 bottom
C188 "104" 0402#1 47.384,50.839 r135 bottom
C189 "104" 0402#1 37.732,46.013 r45 bottom
C190 "104" 0402#1 36.08,83.163 r270 top
C191 "104" 0402#1 35.016,83.163 r270 top
C192 "104" 0402#1 14.844,91.273 r180 top
C193 "473" 0402#1 15.2,81.748 r180 top
C194 "10UF/20V" CAP-B 9.053,87.742 r90 top
C195 "470UF/10V" CAP-D 24.852,77.938 r180 top
C196 "104" 0402#1 14.199,78.791 r90 top
C197 "104" 0402#1 15.733,78.802 r90 top
C198 "104" 0402#1 17.247,78.791 r90 top
C199 "104" 0402#1 40.665,91.821 r180 top
C200 "473" 0402#1 41.184,82.408 r180 top
C201 "10UF/20V" CAP-B 34.91,88.428 r90 top
C202 "470UF/10V" CAP-D 50.277,78.09 r180 top
C203 "104" 0402#1 38.608,80.061 r90 top
C204 "104" 0402#1 40.383,80.082 r90 top
C205 "104" 0402#1 42.164,80.061 r90 top
C206 "10UF/20V" CAP-B 64.719,61.57 r270 bottom
C207 "104" 0402#1 88.062,76.911 r0 top
C208 "47UF/16V" CAP-C 99.466,84.049 r90 top
C209 "47UF/16V" CAP-C 86.98,83.856 r90 top
C210 "104" 0402#1 93.777,90.424 r180 top
C211 "10UF/20V" CAP-B 99.441,78.74 r270 top
C212 "10UF/20V" CAP-B 80.823,50.419 r180 top
C213 "104" 0402#1 88.062,78.308 r0 top
C214 "104" 0603 128.626,70.891 r90 bottom
C215 "104" 0603 128.168,19.037 r90 bottom
C216 "104" 0402#1 51.448,41.314 r225 bottom
C217 "104" 0402#1 48.438,41.377 r225 bottom
C218 "104" 0402#1 70.51,47.269 r90 bottom
C219 "104" 0402#1 6.756,48.247 r90 bottom
C220 "104" 0603X 29.261,81.229 r270 bottom
C221 "104" 0603X 17.475,69.342 r180 bottom
C222 "104" 0603X 7.544,71.12 r90 bottom
C223 "104" 0603X 7.544,76.149 r270 bottom
C224 "104" 0603X 15.875,68.047 r0 bottom
C225 "104" 0603X 9.398,69.393 r0 bottom
C226 "104" 0603X 7.544,79.096 r270 bottom
C227 "104" 0402#1 25.959,26.619 r0 bottom
C228 "104" 0402#1 25.933,25.73 r0 bottom
C229 "470UF/10V" CAP-D 41.631,21.133 r90 bottom
C230 "473" 0402#1 27.635,20.853 r90 bottom
C231 "10UF/20V" CAP-B 15.088,20.65 r90 bottom
C232 "104" 0402#1 18.212,23.089 r270 bottom
D7 "LED0" 0805LED 5.69,63.678 r0 top
D8 "BAT54S-SOT23" SOT23-3L 3.048,54.432 r0 bottom
D9 "BAT54S-SOT23" SOT23-3L 3.023,51.156 r0 bottom
D10 "LED0805" 0805LED 17.932,72.466 r270 top
D11 "LED(绿)" 0805LED 20.549,72.466 r270 top
D12 "0805-LED" 0805LED 83.972,10.998 r90 top
D13 "0805-LED" 0805LED 86.385,10.998 r90 top
D14 "0805-LED" 0805LED 88.951,10.998 r90 top
D15 "0805-LED" 0805LED 91.592,10.998 r90 top
D16 "0805-LED" 0805LED 94.285,10.998 r90 top
D17 "0805-LED" 0805LED 97.079,10.998 r90 top
D18 "0805-LED" 0805LED 99.949,10.998 r90 top
J2 "USB2.0" USB/SM0.8-6H5 7.849,54.064 r180 top
J3 "" HDR1X2 5.055,33.147 r180 top
J4 "FPGA_JTAG" HDR2X5 5.029,9.601 r90 top
L2 "磁珠" 1206A 11.379,41.173 r180 top
L3 "磁珠" 1206A 5.512,60.452 r180 top
L4 "磁珠" 1206A 131.801,72.085 r0 top
L5 "磁珠" 1206A 132.791,20.142 r0 top
L6 "5.6uH" L5R2 82.561,91.603 r180 top
L7 "5.6uH" L5R2 31.431,91.375 r180 top
L8 "5.6uH" L5R2 57.186,91.451 r180 top
L9 "5.6uH" L5R2 38.303,28.677 r270 bottom
O1 "RX_HFBR-2416TZ/2412TZ" OPT 144.273,85.987 r90 top locked
O2 "RX_HFBR-2416TZ/2412TZ" OPT 144.273,33.987 r90 top locked
R1 "101" 0603 52.222,36.119 r90 top
R5 "10R" 0603 135.839,29.108 r0 top
R6 "0R" 0603 135.915,33.223 r180 top
R7 "103" 0603 131.42,29.108 r180 top
R8 "103" 0603 131.42,31.166 r0 top
R9 "103" 0603 131.978,81.026 r180 top
R10 "103" 0603 131.978,83.083 r0 top
R11 "0R" 0603 136.246,85.166 r0 top
R12 "10R" 0603 136.246,80.924 r0 top
R15 "131" 0603 19.964,41.529 r180 top
R16 "820" 0603 19.99,39.649 r180 top
R17 "131" 0603 23.774,41.554 r180 top
R18 "820" 0603 23.749,39.675 r180 top
R29 "103" 0603 2.642,63.627 r180 top
R30 "103" 0603 12.37,57.099 r180 bottom
R31 "222" 0603 52.349,32.868 r0 top
R32 "101" 0603 27.762,45.39 r90 top
R33 "222" 0603 57.15,41.046 r180 top
R34 "103" 0603 20.218,45.187 r90 bottom
R35 "103" 0603 11.419,69.785 r0 top
R36 "103" 0603 11.419,67.854 r0 top
R37 "222" 0603 20.523,64.821 r180 top
R38 "222" 0603 20.549,62.687 r180 top
R39 "104" 0603 9.017,30.175 r180 top
R40 "27.4" 0603 11.405,71.755 r0 top
R41 "472" 0603 57.212,60.844 r0 bottom
R42 "472" 0603 30.81,72.034 r90 top
R43 "472" 0603 28.346,71.933 r90 top
R44 "511" 0603 25.933,71.933 r90 top
R45 "101" 0603 37.821,65.049 r270 top
R46 "102" 0603 34.823,71.247 r0 bottom
R47 "102" 0603 43.612,65.049 r270 top
R48 "472" 0603 8.865,33.147 r180 top
R49 "182" 0603 35.687,65.1 r270 top
R50 "101" 0603 34.823,72.847 r0 bottom
R51 "182" 0603 39.751,65.075 r90 top
R52 "0" 0603 33.68,65.126 r90 top
R53 "33R1%" 0603 118.186,68.326 r180 top
R54 "33R1%" 0603 117.526,17.17 r180 top
R55 "10R" 0603 136.246,76.81 r180 top
R56 "10R" 0603 136.246,83.058 r0 top
R57 "10R" 0603 118.085,85.217 r180 top
R58 "33R1%" 0603 118.008,89.002 r180 top
R59 "33R1%" 0603 117.932,36.601 r180 top
R60 "222" 0603 131.978,87.224 r0 top
R61 "10R" 0603 135.814,24.943 r180 top
R62 "10R" 0603 135.89,31.166 r0 top
R63 "10R" 0603 118.085,32.563 r180 top
R64 "472" 0603 41.681,65.049 r90 top
R65 "222" 0603 131.445,35.306 r180 top
R66 "?" 0603 57.237,58.979 r0 bottom
R67 "101" 0603 45.618,65.049 r90 top
R68 "56R" RESROW_8 71.272,40.361 r180 top
R69 "56R" RESROW_8 66.065,37.084 r180 top
R70 "56R" RESROW_8 75.895,47.854 r270 top
R71 "472" 0402#1 75.311,50.292 r180 top
R72 "101" 0402#1 74.27,49.301 r0 top
R73 "472" 0402#1 63.348,40.234 r0 bottom
R74 "101" 0402#1 68.224,48.641 r45 bottom
R75 "0" 0603 61.453,80.453 r180 top
R76 "0" 0603 11.339,79.64 r180 top
R77 "0" 0603 35.876,80.605 r180 top
R78 "0" 0603 93.356,83.247 r180 top
R79 "102" 0603 83.998,7.976 r90 top
R80 "102" 0603 86.462,7.976 r90 top
R81 "102" 0603 88.976,7.976 r90 top
R82 "102" 0603 91.643,7.976 r90 top
R83 "102" 0603 94.285,7.976 r90 top
R84 "102" 0603 97.13,7.976 r90 top
R85 "102" 0603 99.974,7.976 r90 top
R86 "105" 0603 8.128,48.831 r270 bottom
R88 "103" 0603X 30.886,79.629 r90 bottom
R89 "103" 0603X 15.951,81.585 r0 bottom
R90 "512" 0603 27.534,47.93 r90 bottom
R91 "512" 0603 25.806,55.524 r270 bottom
R92 "512" 0603 30.277,53.035 r270 bottom
R93 "512" 0603 13.691,51.791 r270 top
R94 "0" 0603 26.035,29.515 r90 bottom
R95 "103" 0603 20.498,25.806 r180 bottom
R96 "103" 0603 20.447,28.473 r180 bottom
S1 "复位按键" RESETKEY 5.766,24.308 r90 top
S2 "47R-0805-阻排" RNS001 133.68,61.316 r270 top
S3 "47R-0805--阻排" RNS001 134.391,9.906 r270 top
S4 "复位按键" RESETKEY 77.622,54.305 r0 top
U1 "XC6SLX45-3FGG484I" FGG484 43.18,50.089 r180 top locked
U2 "MT47H64M16HR-3" "FBGA_84 - OK" 64.465,55.829 r0 top
U4 "CY7C68014A-56LFXC" LF56A_N 17.867,52.309 r0 bottom
U5 "IMP811REUS-T" SOT-143 9.881,26.797 r180 top
U6 "24LC64" SMD8XX 9.779,61.671 r0 top
U7 "M25P64-VMF" SOIC16 33.945,68.388 r0 top
U8 "SN74LVC00AD" SMD14X 122.072,68.351 r0 top
U9 "HFBR-1414TZ  TX" OPT 144.273,65.987 r90 top locked
U10 "SN74LVC00AD" SMD14X 121.619,16.485 r0 top
U11 "HFBR-1414TZ   TX" OPT 144.273,13.987 r90 top locked
U12 "MAX997ESA" SMD8XX 128.956,90.424 r180 top
U13 "DS1100L-20" SMD8XX 68.123,63.221 r0 top
U14 "MAX997ESA" SMD8XX 128.626,37.846 r180 top
U15 "TPS54314" SOP20 62.85,84.059 r90 top
U16 "TPS54316" SOP20 11.776,83.185 r90 top
U17 "TPS54312" SOP20 37.668,83.896 r90 top
U18 "LT1963ES8-2.5" so_8 90.765,89.012 r0 top
U19 "LP2996M" so_8 90.957,80.721 r0 top
U20 "FM24V01-G" SMD8XX 64.364,31.699 r180 top
U21 "ADUM1201" SMD8XX 27.711,76.759 r180 bottom
U22 "MAX232A" SMD16XX 7.823,83.414 r0 bottom
U23 "TPS54316" SOP20 26.238,24.282 r180 bottom
X1 "Header 2" HDR1X2 4.166,88.748 r270 top
X2 "4PIN-2.54" SIP4X 3.531,77.902 r270 top
X3 "IDC80" SDC80_1.27MM_MALE 68.58,9.906 r180 top
Y2 "24.000MHz" CRYSTAL_2 6.807,42.164 r0 bottom
Y3 "OCS7050(LVPECL)-3.3V-100M-20PPM" 100M_DIFF 17.983,32.817 r0 top

## Footprints (in the part's own frame and the unit in brackets; to place one, negate y for a bottom-side part, rotate by r counter-clockwise, add the part's x,y. Pads: shape width x height; smd on the part's side, far side on the other; paste and mask are expansions set on the pad)
100M_DIFF [mm]
  rect 1.5x1.8 smd: 1(0,0) 2(2.54,0) 3(5.08,0) 4(5.08,4.5) 5(2.54,4.5) 6(0,4.5)
  silkscreen extent -1.27,1.27 6.35,3.3
0402#1 [mil]
  rect 20x22 smd: 1(-0.3,-0.02) 2(41.7,-0.02)
  silkscreen extent 21,-12 21,12
0402#2 [mil]
  rect 20x22 smd: 1(-0.3,-0.02)
  oval 20x22 smd: 2(41.7,-0.02)
  silkscreen extent 21,-12 21,12
0603 [mil]
  rect 43x40 smd: 1(-33.5,0) 2(33.5,0)
  silkscreen extent -65,-30 65,30
0603X [mm]
  rect 0.762x1 smd: 1(0,0) 2(1.6,0)
  silkscreen extent -0.64,-0.64 2.29,0.64
0805LED [mil]
  rect 40x50 smd: 1(0,0) 2(90,0)
  silkscreen extent -35,-40 125,40
1206A [mil]
  rect 60x60 smd: 1(0,0) 2(130,0)
  silkscreen extent -50,-50 180,50
CAP-B [mm]
  rect 1.5x2.5 smd: 1(1.651,0) 2(-1.905,0)
  silkscreen extent -2.92,-1.52 2.92,1.52
CAP-C [mm]
  rect 1.5x2.5 smd: 1(6,0) 2(0,0)
  silkscreen extent -1.52,-1.78 7.62,1.78
CAP-D [mm]
  rect 2.5x4 smd: 1(3.5,0) 2(-3.5,0)
  silkscreen extent -5.46,-2.54 5.59,2.54
CRYSTAL_2 [mil]
  rect 220x80 smd: 1(0,0) 2(342.52,0)
  silkscreen extent -54,-95 397,95
"FBGA_84 - OK" [mil]
  round 14.5 smd: A1(0,0) A2(31.5,0) A3(62.99,0) A7(188.98,0) A8(220.47,0) A9(251.97,0) B1(0,-31.5) B2(31.5,-31.5) B3(62.99,-31.5) B7(188.98,-31.5) B8(220.47,-31.5) B9(251.97,-31.5) C1(0,-62.99) C2(31.5,-62.99) C3(62.99,-62.99) C7(188.98,-62.99) C8(220.47,-62.99) C9(251.97,-62.99) D1(0,-94.49) D2(31.5,-94.49) D3(62.99,-94.49) D7(188.98,-94.49) D8(220.47,-94.49) D9(251.97,-94.49) E1(0,-125.98) E2(31.5,-125.98) E3(62.99,-125.98) E7(188.98,-125.98) E8(220.47,-125.98) E9(251.97,-125.98) F1(0,-157.48) F2(31.5,-157.48) F3(62.99,-157.48) F7(188.98,-157.48) F8(220.47,-157.48) F9(251.97,-157.48) G1(0,-188.98) G2(31.5,-188.98) G3(62.99,-188.98) G7(188.98,-188.98) G8(220.47,-188.98) G9(251.97,-188.98) H1(0,-220.47) H2(31.5,-220.47) H3(62.99,-220.47) H7(188.98,-220.47) H8(220.47,-220.47) H9(251.97,-220.47) J1(0,-251.97) J2(31.5,-251.97) J3(62.99,-251.97) J7(188.98,-251.97) J8(220.47,-251.97) J9(251.97,-251.97) K2(31.5,-283.47) K3(62.99,-283.47) K7(188.98,-283.47) K8(220.47,-283.47) K9(251.97,-283.47) L1(0,-314.96) L2(31.5,-314.96) L3(62.99,-314.96) L7(188.98,-314.96) L8(220.47,-314.96) M2(31.5,-346.46) M3(62.99,-346.46) M7(188.98,-346.46) M8(220.47,-346.46) M9(251.97,-346.46) N1(0,-377.95) N2(31.5,-377.95) N3(62.99,-377.95) N7(188.98,-377.95) N8(220.47,-377.95) P2(31.5,-409.45) P3(62.99,-409.45) P7(188.98,-409.45) P8(220.47,-409.45) P9(251.97,-409.45) R1(0,-440.94) R2(31.5,-440.94) R3(62.99,-440.94) R7(188.98,-440.94) R8(220.47,-440.94)
  silkscreen extent -110,-476 362,35
FGG484 [mm] "BGA, 484-Leads, Body 23x23mm, Pitch 1mm"
  round 0.5 smd: A1(-10.5,10.5) A2(-9.5,10.5) A3(-8.5,10.5) A4(-7.5,10.5) A5(-6.5,10.5) A6(-5.5,10.5) A7(-4.5,10.5) A8(-3.5,10.5) A9(-2.5,10.5) A10(-1.5,10.5) A11(-0.5,10.5) A12(0.5,10.5) A13(1.5,10.5) A14(2.5,10.5) A15(3.5,10.5) A16(4.5,10.5) A17(5.5,10.5) A18(6.5,10.5) A19(7.5,10.5) A20(8.5,10.5) A21(9.5,10.5) A22(10.5,10.5) AA1(-10.5,-9.5) AA2(-9.5,-9.5) AA3(-8.5,-9.5) AA4(-7.5,-9.5) AA5(-6.5,-9.5) AA6(-5.5,-9.5) AA7(-4.5,-9.5) AA8(-3.5,-9.5) AA9(-2.5,-9.5) AA10(-1.5,-9.5) AA11(-0.5,-9.5) AA12(0.5,-9.5) AA13(1.5,-9.5) AA14(2.5,-9.5) AA15(3.5,-9.5) AA16(4.5,-9.5) AA17(5.5,-9.5) AA18(6.5,-9.5) AA19(7.5,-9.5) AA20(8.5,-9.5) AA21(9.5,-9.5) AA22(10.5,-9.5) AB1(-10.5,-10.5) AB2(-9.5,-10.5) AB3(-8.5,-10.5) AB4(-7.5,-10.5) AB5(-6.5,-10.5) AB6(-5.5,-10.5) AB7(-4.5,-10.5) AB8(-3.5,-10.5) AB9(-2.5,-10.5) AB10(-1.5,-10.5) AB11(-0.5,-10.5) AB12(0.5,-10.5) AB13(1.5,-10.5) AB14(2.5,-10.5) AB15(3.5,-10.5) AB16(4.5,-10.5) AB17(5.5,-10.5) AB18(6.5,-10.5) AB19(7.5,-10.5) AB20(8.5,-10.5) AB21(9.5,-10.5) AB22(10.5,-10.5) B1(-10.5,9.5) B2(-9.5,9.5) B3(-8.5,9.5) B4(-7.5,9.5) B5(-6.5,9.5) B6(-5.5,9.5) B7(-4.5,9.5) B8(-3.5,9.5) B9(-2.5,9.5) B10(-1.5,9.5) B11(-0.5,9.5) B12(0.5,9.5) B13(1.5,9.5) B14(2.5,9.5) B15(3.5,9.5) B16(4.5,9.5) B17(5.5,9.5) B18(6.5,9.5) B19(7.5,9.5) B20(8.5,9.5) B21(9.5,9.5) B22(10.5,9.5) C1(-10.5,8.5) C2(-9.5,8.5) C3(-8.5,8.5) C4(-7.5,8.5) C5(-6.5,8.5) C6(-5.5,8.5) C7(-4.5,8.5) C8(-3.5,8.5) C9(-2.5,8.5) C10(-1.5,8.5) C11(-0.5,8.5) C12(0.5,8.5) C13(1.5,8.5) C14(2.5,8.5) C15(3.5,8.5) C16(4.5,8.5) C17(5.5,8.5) C18(6.5,8.5) C19(7.5,8.5) C20(8.5,8.5) C21(9.5,8.5) C22(10.5,8.5) D1(-10.5,7.5) D2(-9.5,7.5) D3(-8.5,7.5) D4(-7.5,7.5) D5(-6.5,7.5) D6(-5.5,7.5) D7(-4.5,7.5) D8(-3.5,7.5) D9(-2.5,7.5) D10(-1.5,7.5) D11(-0.5,7.5) D12(0.5,7.5) D13(1.5,7.5) D14(2.5,7.5) D15(3.5,7.5) D16(4.5,7.5) D17(5.5,7.5) D18(6.5,7.5) D19(7.5,7.5) D20(8.5,7.5) D21(9.5,7.5) D22(10.5,7.5) E1(-10.5,6.5) E2(-9.5,6.5) E3(-8.5,6.5) E4(-7.5,6.5) E5(-6.5,6.5) E6(-5.5,6.5) E7(-4.5,6.5) E8(-3.5,6.5) E9(-2.5,6.5) E10(-1.5,6.5) E11(-0.5,6.5) E12(0.5,6.5) E13(1.5,6.5) E14(2.5,6.5) E15(3.5,6.5) E16(4.5,6.5) E17(5.5,6.5) E18(6.5,6.5) E19(7.5,6.5) E20(8.5,6.5) E21(9.5,6.5) E22(10.5,6.5) F1(-10.5,5.5) F2(-9.5,5.5) F3(-8.5,5.5) F4(-7.5,5.5) F5(-6.5,5.5) F6(-5.5,5.5) F7(-4.5,5.5) F8(-3.5,5.5) F9(-2.5,5.5) F10(-1.5,5.5) F11(-0.5,5.5) F12(0.5,5.5) F13(1.5,5.5) F14(2.5,5.5) F15(3.5,5.5) F16(4.5,5.5) F17(5.5,5.5) F18(6.5,5.5) F19(7.5,5.5) F20(8.5,5.5) F21(9.5,5.5) F22(10.5,5.5) G1(-10.5,4.5) G2(-9.5,4.5) G3(-8.5,4.5) G4(-7.5,4.5) G5(-6.5,4.5) G6(-5.5,4.5) G7(-4.5,4.5) G8(-3.5,4.5) G9(-2.5,4.5) G10(-1.5,4.5) G11(-0.5,4.5) G12(0.5,4.5) G13(1.5,4.5) G14(2.5,4.5) G15(3.5,4.5) G16(4.5,4.5) G17(5.5,4.5) G18(6.5,4.5) G19(7.5,4.5) G20(8.5,4.5) G21(9.5,4.5) G22(10.5,4.5) H1(-10.5,3.5) H2(-9.5,3.5) H3(-8.5,3.5) H4(-7.5,3.5) H5(-6.5,3.5) H6(-5.5,3.5) H7(-4.5,3.5) H8(-3.5,3.5) H9(-2.5,3.5) H10(-1.5,3.5) H11(-0.5,3.5) H12(0.5,3.5) H13(1.5,3.5) H14(2.5,3.5) H15(3.5,3.5) H16(4.5,3.5) H17(5.5,3.5) H18(6.5,3.5) H19(7.5,3.5) H20(8.5,3.5) H21(9.5,3.5) H22(10.5,3.5) J1(-10.5,2.5) J2(-9.5,2.5) J3(-8.5,2.5) J4(-7.5,2.5) J5(-6.5,2.5) J6(-5.5,2.5) J7(-4.5,2.5) J8(-3.5,2.5) J9(-2.5,2.5) J10(-1.5,2.5) J11(-0.5,2.5) J12(0.5,2.5) J13(1.5,2.5) J14(2.5,2.5) J15(3.5,2.5) J16(4.5,2.5) J17(5.5,2.5) J18(6.5,2.5) J19(7.5,2.5) J20(8.5,2.5) J21(9.5,2.5) J22(10.5,2.5) K1(-10.5,1.5) K2(-9.5,1.5) K3(-8.5,1.5) K4(-7.5,1.5) K5(-6.5,1.5) K6(-5.5,1.5) K7(-4.5,1.5) K8(-3.5,1.5) K9(-2.5,1.5) K10(-1.5,1.5) K11(-0.5,1.5) K12(0.5,1.5) K13(1.5,1.5) K14(2.5,1.5) K15(3.5,1.5) K16(4.5,1.5) K17(5.5,1.5) K18(6.5,1.5) K19(7.5,1.5) K20(8.5,1.5) K21(9.5,1.5) K22(10.5,1.5) L1(-10.5,0.5) L2(-9.5,0.5) L3(-8.5,0.5) L4(-7.5,0.5) L5(-6.5,0.5) L6(-5.5,0.5) L7(-4.5,0.5) L8(-3.5,0.5) L9(-2.5,0.5) L10(-1.5,0.5) L11(-0.5,0.5) L12(0.5,0.5) L13(1.5,0.5) L14(2.5,0.5) L15(3.5,0.5) L16(4.5,0.5) L17(5.5,0.5) L18(6.5,0.5) L19(7.5,0.5) L20(8.5,0.5) L21(9.5,0.5) L22(10.5,0.5) M1(-10.5,-0.5) M2(-9.5,-0.5) M3(-8.5,-0.5) M4(-7.5,-0.5) M5(-6.5,-0.5) M6(-5.5,-0.5) M7(-4.5,-0.5) M8(-3.5,-0.5) M9(-2.5,-0.5) M10(-1.5,-0.5) M11(-0.5,-0.5) M12(0.5,-0.5) M13(1.5,-0.5) M14(2.5,-0.5) M15(3.5,-0.5) M16(4.5,-0.5) M17(5.5,-0.5) M18(6.5,-0.5) M19(7.5,-0.5) M20(8.5,-0.5) M21(9.5,-0.5) M22(10.5,-0.5) N1(-10.5,-1.5) N2(-9.5,-1.5) N3(-8.5,-1.5) N4(-7.5,-1.5) N5(-6.5,-1.5) N6(-5.5,-1.5) N7(-4.5,-1.5) N8(-3.5,-1.5) N9(-2.5,-1.5) N10(-1.5,-1.5) N11(-0.5,-1.5) N12(0.5,-1.5) N13(1.5,-1.5) N14(2.5,-1.5) N15(3.5,-1.5) N16(4.5,-1.5) N17(5.5,-1.5) N18(6.5,-1.5) N19(7.5,-1.5) N20(8.5,-1.5) N21(9.5,-1.5) N22(10.5,-1.5) P1(-10.5,-2.5) P2(-9.5,-2.5) P3(-8.5,-2.5) P4(-7.5,-2.5) P5(-6.5,-2.5) P6(-5.5,-2.5) P7(-4.5,-2.5) P8(-3.5,-2.5) P9(-2.5,-2.5) P10(-1.5,-2.5) P11(-0.5,-2.5) P12(0.5,-2.5) P13(1.5,-2.5) P14(2.5,-2.5) P15(3.5,-2.5) P16(4.5,-2.5) P17(5.5,-2.5) P18(6.5,-2.5) P19(7.5,-2.5) P20(8.5,-2.5) P21(9.5,-2.5) P22(10.5,-2.5) R1(-10.5,-3.5) R2(-9.5,-3.5) R3(-8.5,-3.5) R4(-7.5,-3.5) R5(-6.5,-3.5) R6(-5.5,-3.5) R7(-4.5,-3.5) R8(-3.5,-3.5) R9(-2.5,-3.5) R10(-1.5,-3.5) R11(-0.5,-3.5) R12(0.5,-3.5) R13(1.5,-3.5) R14(2.5,-3.5) R15(3.5,-3.5) R16(4.5,-3.5) R17(5.5,-3.5) R18(6.5,-3.5) R19(7.5,-3.5) R20(8.5,-3.5) R21(9.5,-3.5) R22(10.5,-3.5) T1(-10.5,-4.5) T2(-9.5,-4.5) T3(-8.5,-4.5) T4(-7.5,-4.5) T5(-6.5,-4.5) T6(-5.5,-4.5) T7(-4.5,-4.5) T8(-3.5,-4.5) T9(-2.5,-4.5) T10(-1.5,-4.5) T11(-0.5,-4.5) T12(0.5,-4.5) T13(1.5,-4.5) T14(2.5,-4.5) T15(3.5,-4.5) T16(4.5,-4.5) T17(5.5,-4.5) T18(6.5,-4.5) T19(7.5,-4.5) T20(8.5,-4.5) T21(9.5,-4.5) T22(10.5,-4.5) U1(-10.5,-5.5) U2(-9.5,-5.5) U3(-8.5,-5.5) U4(-7.5,-5.5) U5(-6.5,-5.5) U6(-5.5,-5.5) U7(-4.5,-5.5) U8(-3.5,-5.5) U9(-2.5,-5.5) U10(-1.5,-5.5) U11(-0.5,-5.5) U12(0.5,-5.5) U13(1.5,-5.5) U14(2.5,-5.5) U15(3.5,-5.5) U16(4.5,-5.5) U17(5.5,-5.5) U18(6.5,-5.5) U19(7.5,-5.5) U20(8.5,-5.5) U21(9.5,-5.5) U22(10.5,-5.5) V1(-10.5,-6.5) V2(-9.5,-6.5) V3(-8.5,-6.5) V4(-7.5,-6.5) V5(-6.5,-6.5) V6(-5.5,-6.5) V7(-4.5,-6.5) V8(-3.5,-6.5) V9(-2.5,-6.5) V10(-1.5,-6.5) V11(-0.5,-6.5) V12(0.5,-6.5) V13(1.5,-6.5) V14(2.5,-6.5) V15(3.5,-6.5) V16(4.5,-6.5) V17(5.5,-6.5) V18(6.5,-6.5) V19(7.5,-6.5) V20(8.5,-6.5) V21(9.5,-6.5) V22(10.5,-6.5) W1(-10.5,-7.5) W2(-9.5,-7.5) W3(-8.5,-7.5) W4(-7.5,-7.5) W5(-6.5,-7.5) W6(-5.5,-7.5) W7(-4.5,-7.5) W8(-3.5,-7.5) W9(-2.5,-7.5) W10(-1.5,-7.5) W11(-0.5,-7.5) W12(0.5,-7.5) W13(1.5,-7.5) W14(2.5,-7.5) W15(3.5,-7.5) W16(4.5,-7.5) W17(5.5,-7.5) W18(6.5,-7.5) W19(7.5,-7.5) W20(8.5,-7.5) W21(9.5,-7.5) W22(10.5,-7.5) Y1(-10.5,-8.5) Y2(-9.5,-8.5) Y3(-8.5,-8.5) Y4(-7.5,-8.5) Y5(-6.5,-8.5) Y6(-5.5,-8.5) Y7(-4.5,-8.5) Y8(-3.5,-8.5) Y9(-2.5,-8.5) Y10(-1.5,-8.5) Y11(-0.5,-8.5) Y12(0.5,-8.5) Y13(1.5,-8.5) Y14(2.5,-8.5) Y15(3.5,-8.5) Y16(4.5,-8.5) Y17(5.5,-8.5) Y18(6.5,-8.5) Y19(7.5,-8.5) Y20(8.5,-8.5) Y21(9.5,-8.5) Y22(10.5,-8.5)
  silkscreen extent -12.27,-11.5 11.5,11.5, body extent -11.5,-11.5 11.5,11.5, height 2.6
HDR1X2 [mm] "Connector; Header; 2 Position"
  rect 1.5x1.5 hole 0.9: 1(0,0)
  round 1.5 hole 0.9: 2(2.54,0)
  silkscreen extent -1.27,-1.27 3.81,1.27
HDR2X5 [mm] "Connector; Header; 5x2 Position"
  rect 1.5x1.5 hole 0.9: 1(0,0)
  round 1.5 hole 0.9: 2(0,2.54) 3(2.54,0) 4(2.54,2.54) 5(5.08,0) 6(5.08,2.54) 7(7.62,0) 8(7.62,2.54) 9(10.16,0) 10(10.16,2.54)
  silkscreen extent -1.27,-1.27 11.43,3.81
L5R2 [mm]
  rect 3x5 smd: 1(1.524,5.08) 2(11.176,5.08)
  silkscreen extent 0,0 12.7,10.16
LF56A_N [mm]
  rect 0.7x0.28 smd: 1(-3.9,3.25) 14(-3.9,-3.25) 29(3.9,-3.25) 42(3.9,3.25)
  rect 0.8x0.28 smd: 2(-3.85,2.75) 3(-3.85,2.25) 4(-3.85,1.75) 5(-3.85,1.25) 6(-3.85,0.75) 7(-3.85,0.25) 8(-3.85,-0.25) 9(-3.85,-0.75) 10(-3.85,-1.25) 11(-3.85,-1.75) 12(-3.85,-2.25) 13(-3.85,-2.75) 30(3.85,-2.75) 31(3.85,-2.25) 32(3.85,-1.75) 33(3.85,-1.25) 34(3.85,-0.75) 35(3.85,-0.25) 36(3.85,0.25) 37(3.85,0.75) 38(3.85,1.25) 39(3.85,1.75) 40(3.85,2.25) 41(3.85,2.75)
  rect 0.28x0.7 smd: 15(-3.25,-3.9) 28(3.25,-3.9) 43(3.25,3.9) 56(-3.25,3.9)
  rect 0.28x0.8 smd: 16(-2.75,-3.85) 17(-2.25,-3.85) 18(-1.75,-3.85) 19(-1.25,-3.85) 20(-0.75,-3.85) 21(-0.25,-3.85) 22(0.25,-3.85) 23(0.75,-3.85) 24(1.25,-3.85) 25(1.75,-3.85) 26(2.25,-3.85) 27(2.75,-3.85) 44(2.75,3.85) 45(2.25,3.85) 46(1.75,3.85) 47(1.25,3.85) 48(0.75,3.85) 49(0.25,3.85) 50(-0.25,3.85) 51(-0.75,3.85) 52(-1.25,3.85) 53(-1.75,3.85) 54(-2.25,3.85) 55(-2.75,3.85)
  rect 5.22x5.22 smd: 57(0,0)
  silkscreen extent -4.15,-4.15 4.15,4.15
OPT [mm]
  rect 1.5x1.5 hole 0.9: 1(3.81,1.27)
  round 1.5 hole 0.9: 2(1.27,1.27) 3(-1.27,1.27) 4(-3.81,1.27) 5(-3.81,-1.27) 6(-1.27,-1.27) 7(1.27,-1.27) 8(3.81,-1.27)
  silkscreen extent -6.35,-22.12 6.35,5.08
RESETKEY [mm]
  rect 1.5x1.5 smd: 0(0,3.937) 0(5.969,0.127) 1(0,0.254) 2(5.969,3.937)
  silkscreen extent 0,0 5.97,4.06
RESROW_8 [mil]
  rect 15x30 smd: 1(-0.38,0.14) 8(142.93,0.14) 9(142.93,60.14) 16(-0.38,60.14)
  rect 10x30 smd: 2(22.06,0.14) 3(41.75,0.14) 4(61.43,0.14) 5(81.12,0.14) 6(100.8,0.14) 7(120.49,0.14) 10(120.49,60.14) 11(100.8,60.14) 12(81.12,60.14) 13(61.43,60.14) 14(41.75,60.14) 15(22.06,60.14)
  silkscreen extent -21,-30 163,90
RNS001 [mil]
  rect 32x51 smd: 1(-75,-59) 2(-25,-59) 3(25,-59) 4(75,-59) 5(75,59) 6(25,59) 7(-25,59) 8(-75,59)
  silkscreen extent -122,-61 100,25
SDC80_1.27MM_MALE [mm]
  rect 0.74x2.92 smd: 1(1.59,1.715) 2(1.59,-1.715) 3(2.86,1.715) 4(2.86,-1.715) 5(4.13,1.715) 6(4.13,-1.715) 7(5.4,1.715) 8(5.4,-1.715) 9(6.67,1.715) 10(6.67,-1.715) 11(7.94,1.715) 12(7.94,-1.715) 13(9.21,1.715) 14(9.21,-1.715) 15(10.48,1.715) 16(10.48,-1.715) 17(11.75,1.715) 18(11.75,-1.715) 19(13.02,1.715) 20(13.02,-1.715) 21(14.29,1.715) 22(14.29,-1.715) 23(15.56,1.715) 24(15.56,-1.715) 25(16.83,1.715) 26(16.83,-1.715) 27(18.1,1.715) 28(18.1,-1.715) 29(19.37,1.715) 30(19.37,-1.715) 31(20.64,1.715) 32(20.64,-1.715) 33(21.91,1.715) 34(21.91,-1.715) 35(23.18,1.715) 36(23.18,-1.715) 37(24.45,1.715) 38(24.45,-1.715) 39(25.72,1.715) 40(25.72,-1.715) 41(26.99,1.715) 42(26.99,-1.715) 43(28.26,1.715) 44(28.26,-1.715) 45(29.53,1.715) 46(29.53,-1.715) 47(30.8,1.715) 48(30.8,-1.715) 49(32.07,1.715) 50(32.07,-1.715) 51(33.34,1.715) 52(33.34,-1.715) 53(34.61,1.715) 54(34.61,-1.715) 55(35.88,1.715) 56(35.88,-1.715) 57(37.15,1.715) 58(37.15,-1.715) 59(38.42,1.715) 60(38.42,-1.715) 61(39.69,1.715) 62(39.69,-1.715) 63(40.96,1.715) 64(40.96,-1.715) 65(42.23,1.715) 66(42.23,-1.715) 67(43.5,1.715) 68(43.5,-1.715) 69(44.77,1.715) 70(44.77,-1.715) 71(46.04,1.715) 72(46.04,-1.715) 73(47.31,1.715) 74(47.31,-1.715) 75(48.58,1.715) 76(48.58,-1.715) 77(49.85,1.715) 78(49.85,-1.715) 79(51.12,1.715) 80(51.12,-1.715)
  round 1.524 hole 1.35: A(0,0) B(52.71,0)
  silkscreen extent -1.14,-3.43 53.85,3.43
SIP4X [mm]
  rect 1.524x2 hole 1: 1(0.02,0.006)
  oval 1.524x2 hole 1: 2(2.56,0.006) 3(5.1,0.006) 4(7.64,0.006)
  silkscreen extent -2.52,-2.53 10.18,3.05
SMD8XX [mm]
  rect 2.5x0.6 smd: 1(1.153,4.448) 2(1.153,3.198) 3(1.153,1.948) 4(1.153,0.698) 5(7.153,0.698) 6(7.153,1.948) 7(7.153,3.198) 8(7.153,4.448)
  silkscreen extent 2.93,0 5.34,5.08
SMD14X [mm]
  rect 2.5x0.6 smd: 1(0,0) 2(0,-1.27) 3(0,-2.54) 4(0,-3.81) 5(0,-5.08) 6(0,-6.35) 7(0,-7.62) 8(6.6,-7.62) 9(6.6,-6.35) 10(6.6,-5.08) 11(6.6,-3.81) 12(6.6,-2.54) 13(6.6,-1.27) 14(6.6,0)
  silkscreen extent 1.52,-8.25 5.08,0.64
SMD16XX [mil]
  rect 98.42x24 smd: 1(90,485) 2(90,435) 3(90,385) 4(90,335) 5(90,285) 6(90,235) 7(90,185) 8(90,135) 9(350,135) 10(350,185) 11(350,235) 12(350,285) 13(350,335) 14(350,385) 15(350,435) 16(350,485)
  silkscreen extent 145,105 295,510
so_8 [mm]
  rect 1.8x0.6 smd: 1(0,0)
  oval 1.8x0.6 smd: 2(0,-1.27) 3(0,-2.54) 4(0,-3.81) 5(5.188,-3.81) 6(5.188,-2.54) 7(5.188,-1.27) 8(5.188,0)
  silkscreen extent 1.32,-4.44 3.86,0.64
SOIC16 [mm]
  rect 0.6x2.25 smd: 1(0,0) 2(1.27,0) 3(2.54,0) 4(3.81,0) 5(5.08,0) 6(6.35,0) 7(7.62,0) 8(8.89,0) 9(8.89,9.15) 10(7.62,9.15) 11(6.35,9.15) 12(5.08,9.15) 13(3.81,9.15) 14(2.54,9.15) 15(1.27,9.15) 16(0,9.15)
  silkscreen extent -0.97,-0.12 9.72,7.63
SOP20 [mm]
  rect 1.5x0.3 smd: 1(0,0)
  oval 1.5x0.3 smd: 2(0,-0.65) 3(0,-1.3) 4(0,-1.95) 5(0,-2.6) 6(0,-3.25) 7(0,-3.9) 8(0,-4.55) 9(0,-5.2) 10(0,-5.85) 11(6.6,-5.85) 12(6.6,-5.2) 13(6.6,-4.55) 14(6.6,-3.9) 15(6.6,-3.25) 16(6.6,-2.6) 17(6.6,-1.95) 18(6.6,-1.3) 19(6.6,-0.65) 20(6.6,0)
  silkscreen extent 1.58,-6.18 5.02,0.33
SOT23-3L [mm] "SOT23, 3-Leads, Body 2.9x1.3mm, Pitch 0.95mm, Lead Span 2.5mm, IPC High Density"
  rect 1.2x0.6 smd: 1(-0.9,0.95) 2(-0.9,-0.95) 3(0.9,0)
  silkscreen extent -1.02,-1.5 0.7,1.92, body extent -0.7,-1.5 0.7,1.5, height 1.1
SOT-143 [mil]
  rect 40x50 smd: 1(0,0)
  rect 30x50 smd: 2(70,0) 3(70,100) 4(-5,100)
  silkscreen extent -40,30 105,70
USB/SM0.8-6H5 [mm]
  rect 2.3x0.5 smd: 1(0,0) 2(0,0.8) 3(0,1.6) 4(0,2.4) 5(0,3.2)
  rect 2.5x2 smd: 6(0.1,6.05) 7(5.6,6.05) 8(0.1,-2.85) 9(5.6,-2.85)
  round 0.6 hole 0.9: MH1(2.6,3.8) MH2(2.6,-0.6)
  silkscreen extent -1.83,-3.35 8.55,6.55

## Part data
C43 C44 C46 C47 C48 C49 C50 C51 C52 C53 C54 C55 C56 C58 C59 C60 C61 C69 C71 C72 C73 C74 C75 C76 C77 C78 C79 C80 C81 C82 C83 C84 C85 C86 C87 C88 C89 C90 C91 C92 C93 C94 C95 C96 C97 C98 C99 C100 C101 C102 C103 C104 C105 C106 C107 C108 C109 C110 C111 C112 C113 C114 C115 C116 C117 C118 C119 C120 C121 C122 C123 C124 C125 C126 C127 C128 C129 C130 C131 C132 C133 C134 C135 C136 C137 C138 C139 C140 C141 C142 C143 C144 C145 C146 C147 C148 C149 C150 C151 C152 C153 C154 C155 C156 C157 C158 C159 C160 C161 C162 C163 C167 C168 C169 C171 C172 C173 C174 C175 C176 C177 C178 C179 C180 C181 C182 C183 C184 C185 C186 C187 C188 C189 C190 C191 C192 C196 C197 C198 C199 C203 C204 C205 C207 C210 C213 C214 C215 C216 C217 C218 C219 C227 C228 C232: library part Cap, "Capacitor"
C45 C165 C166 C194 C195 C201 C202 C206 C208 C209 C211 C212 C229 C231: library part "Cap Pol2", "Polarized Capacitor (Axial)"
C62 C63 C64 C65 C66 C67 C68 C70: library part "Cap Semi", "Capacitor (Semiconductor SIM Model)"
C164 C170 C193 C200 C220 C221 C222 C223 C224 C225 C226 C230: library part CAP, "Capacitor"
D7: "Typical INFRARED GaAs LED"
D8 D9: library part BAV99, "Silicon Switching Diode Array for High-Speed Switching"
D10 D11 D12 D13 D14 D15 D16 D17 D18: library part LED0, "Typical INFRARED GaAs LED"
J2: library part "Header 6", "Header, 6-Pin"
J3: library part "Header 2", "Header, 2-Pin"
J4: library part "Header 5X2", "Header, 5-Pin, Dual row"
L2 L3 L4 L5: library part Inductor, "Inductor"
L6 L7 L8 L9: library part INDUCTOR1
O1 O2: library part OPTO
R1 R15 R16 R17 R18 R29 R30 R31 R32 R33 R34 R35 R36 R37 R38 R39 R40 R41 R42 R43 R44 R45 R46 R47 R48 R49 R50 R51 R52 R53 R54 R58 R59 R64 R66 R67 R71 R72 R73 R74 R75 R76 R77 R78 R79 R80 R81 R82 R83 R84 R85 R86 R90 R91 R92 R93 R94 R95 R96: library part Res2, "Resistor"
R5 R6 R7 R8 R9 R10 R11 R12 R55 R56 R57 R60 R61 R62 R63 R65: library part Res3, "Resistor"
R68 R69 R70: library part "Res Pack3", "Isolated Resistor Network"
R88 R89: library part RES2
S1 S4: library part SW-PB
S2 S3: library part "SW DIP-4", "DIP Switch, 4 Position, SPST"
U1: "Spartan-6 LX 1.2V FPGA, 316 User I/Os, 484-Ball Fine-Pitch BGA (1.0mm Pitch), Speed Grade 3, Industrial Grade, Pb-Free"
U2: library part "DDR2 64Mx16 MT47H64M16HR-25", "64Mx16-bit DDR2 SDRAM"
U4: "EZ-USB FX2LP USB Microcontroller Ideal for Battery Powered Applications,16K RAM, 24 I/Os, 56-Pin QFN, Pb-Free, Commercial Grade"
U5: library part MAX811-EUS-T, "4-Pin 礟 Voltage Monitors with Manual Reset Input"
U6 U20: library part 24LC02B-I/SN, "2Kbit, 400kHz, 2.5V, I2C Serial EEPROM, 8-Pin SOIC 150mil, Industrial Temperature"
U7: library part "SPI FLASH 128Mb S25FL128P", "SPI FLASH 128Mbit, 104MHz, 64kB sector"
U8 U10: "Quadruple 2-Input Positive-NAND Gate"
U9 U11: library part HFBR-1414
U12 U14: library part MAX998ESA, "Single, SOT23, Single-Supply, High-Speed, Low-Power Comparator"
U13: library part DS1004Z-2, "5-Tap High-Speed Silicon Delay Line"
U15 U16 U23: library part TPS54312, "TPS54312"
U18: library part LT1962EMS8, "300mA, Low Noise, Micropower Low Dropout Regulator"
U19: "DDR Termination Regulator"
X1: "Header, 2-Pin"
X2: library part CON4, "Connector"
Y2: library part XTAL, "Crystal Oscillator"
Y3: library part Component_1

## Free pads (board coordinates)
  round 1 hole 0.5: 0(2.21,60.452) 0(3.579,44.829) 0(3.593,39.409) 0(6.604,35.077) 0(8.034,63.619) 0(8.458,69.469) 0(9.715,28.397) 0(11.557,58.369) 0(12.344,76.251) 0(12.421,49.733) 0(13.31,76.251) 0(14.072,73.508) 0(14.224,77.597) 0(14.249,76.251) 0(14.489,67.854) 0(15.926,38.913) 0(18.883,44.501) 0(22.784,30.048) 0(22.962,70.18) 0(28.499,76.454) 0(28.524,77.445) 0(31.064,43.891) 0(32.512,84.15) 0(32.831,80.63) 0(33.807,80.63) 0(34.747,80.63) 0(41.565,79.299) 0(47.523,64.224) 0(47.523,65.926) 0(53.746,77.241) 0(53.746,79.096) 0(53.848,28.527) 0(58.064,58.953) 0(60.325,59.258) 0(60.603,76.837) 0(60.603,77.826) 0(60.603,78.816) 0(61.062,28.527) 0(61.484,32.401) 0(63.18,19.634) 0(63.18,20.61) 0(64.414,15.748) 0(64.44,14.783) 0(64.719,63.373) 0(65.44,79.182) 0(67.882,59.106) 0(68.798,32.705) 0(69.162,35.507) 0(69.583,59.106) 0(72.149,59.106) 0(73.838,55.359) 0(73.838,57.061) 0(73.85,59.106) 0(74.168,37.567) 0(75.184,41.707) 0(79.07,78.511) 0(79.096,76.962) 0(79.146,49.733) 0(79.146,51.054) 0(80.627,45.644) 0(81.661,58.242) 0(82.779,51.079) 0(82.804,49.886) 0(91.034,74.879) 0(91.034,75.87) 0(92.71,80.442) 0(93.137,79.066) 0(93.833,79.761) 0(94.59,78.181) 0(95.606,83.261) 0(96.571,83.261) 0(102.057,77.114) 0(103.022,77.114) 0(103.454,9.068) 0(103.454,10.033) 0(103.988,77.114) 0(115.494,34.569) 0(115.621,32.588) 0(115.9,87.147) 0(117.246,83.515) 0(118.77,9.576) 0(119.431,60.731) 0(126.886,71.742) 0(127.483,38.532) 0(128.219,17.297) 0(128.651,69.215) 0(128.981,31.166) 0(129.134,29.083) 0(129.616,19.837) 0(129.946,85.217) 0(130.302,89.713) 0(131.127,79.337) 0(131.801,73.431) 0(132.055,17.653) 0(132.74,70.409) 0(132.791,22.098) 0(138.405,27.026) 0(138.557,78.867)
  round 0.6 hole 0.3: 0(6.833,47.701) 0(9.398,49.682) 0(9.703,50.876) 0(9.703,51.638) 0(15.545,49.936) 0(15.545,50.521) 0(15.545,51.105) 0(15.545,51.689) 0(15.545,52.273) 0(15.545,52.857) 0(15.545,53.442) 0(15.545,54.026) 0(15.545,54.61) 0(18.059,31.242) 0(20.193,52.857) 0(20.193,53.442) 0(20.193,54.026) 0(20.193,54.61) 0(20.599,31.039)
  round 1.524 hole 0.762: 0(9.053,85.837) 0(15.088,18.745) 0(34.656,86.549) 0(59.98,86.777) 0(149.911,9.906) 1(15.088,17.196) 1(16.993,85.877) 1(42.596,86.589) 1(67.92,86.817) 1(149.86,11.354) 2(13.132,85.903) 2(26.01,30.455) 2(38.735,86.614) 2(64.059,86.843) 2(66.345,14.63) 3(98.857,84.099) 4(99.441,80.645) 5(86.157,83.845) 6(86.36,78.156) 7(66.396,16.053) 8(8.738,82.372) 9(7.214,82.372) 10(5.69,82.372) 11(100.33,84.074) 12(87.63,83.82)
  round 6 hole 2.5: 0(28.194,35.585) 0(28.194,65.585) 0(58.194,35.585) 0(58.194,65.585)
  round 1.6 hole 1: 0(129.489,27) 0(130.404,77.749) 0(132.41,26.975) 0(133.172,77.699) 0(134.62,37.744) 0(134.671,89.154) 0(137.439,37.668) 0(137.871,89.179)
  round 4 hole 3: 1(2.5,2.5) 1(2.5,97.1) 1(10,9.797) 1(15,27.797) 1(75,9.797) 1(75,27.797) 1(148.5,2.5) 1(148.5,97.1)
  round 1.2 smd: 4(8,98) 4(142,2)

## Via types
v1: diameter 0.508, hole 0.254, Top Layer to Bottom Layer, 259 vias
v2: diameter 0.483, hole 0.254, Top Layer to Bottom Layer, 230 vias
v3: diameter 0.483, hole 0.254, Top Layer to Bottom Layer, tented top, 1 vias